# EAGLE board pcie-host (EAGLE 8.3.2), part 1 of 2
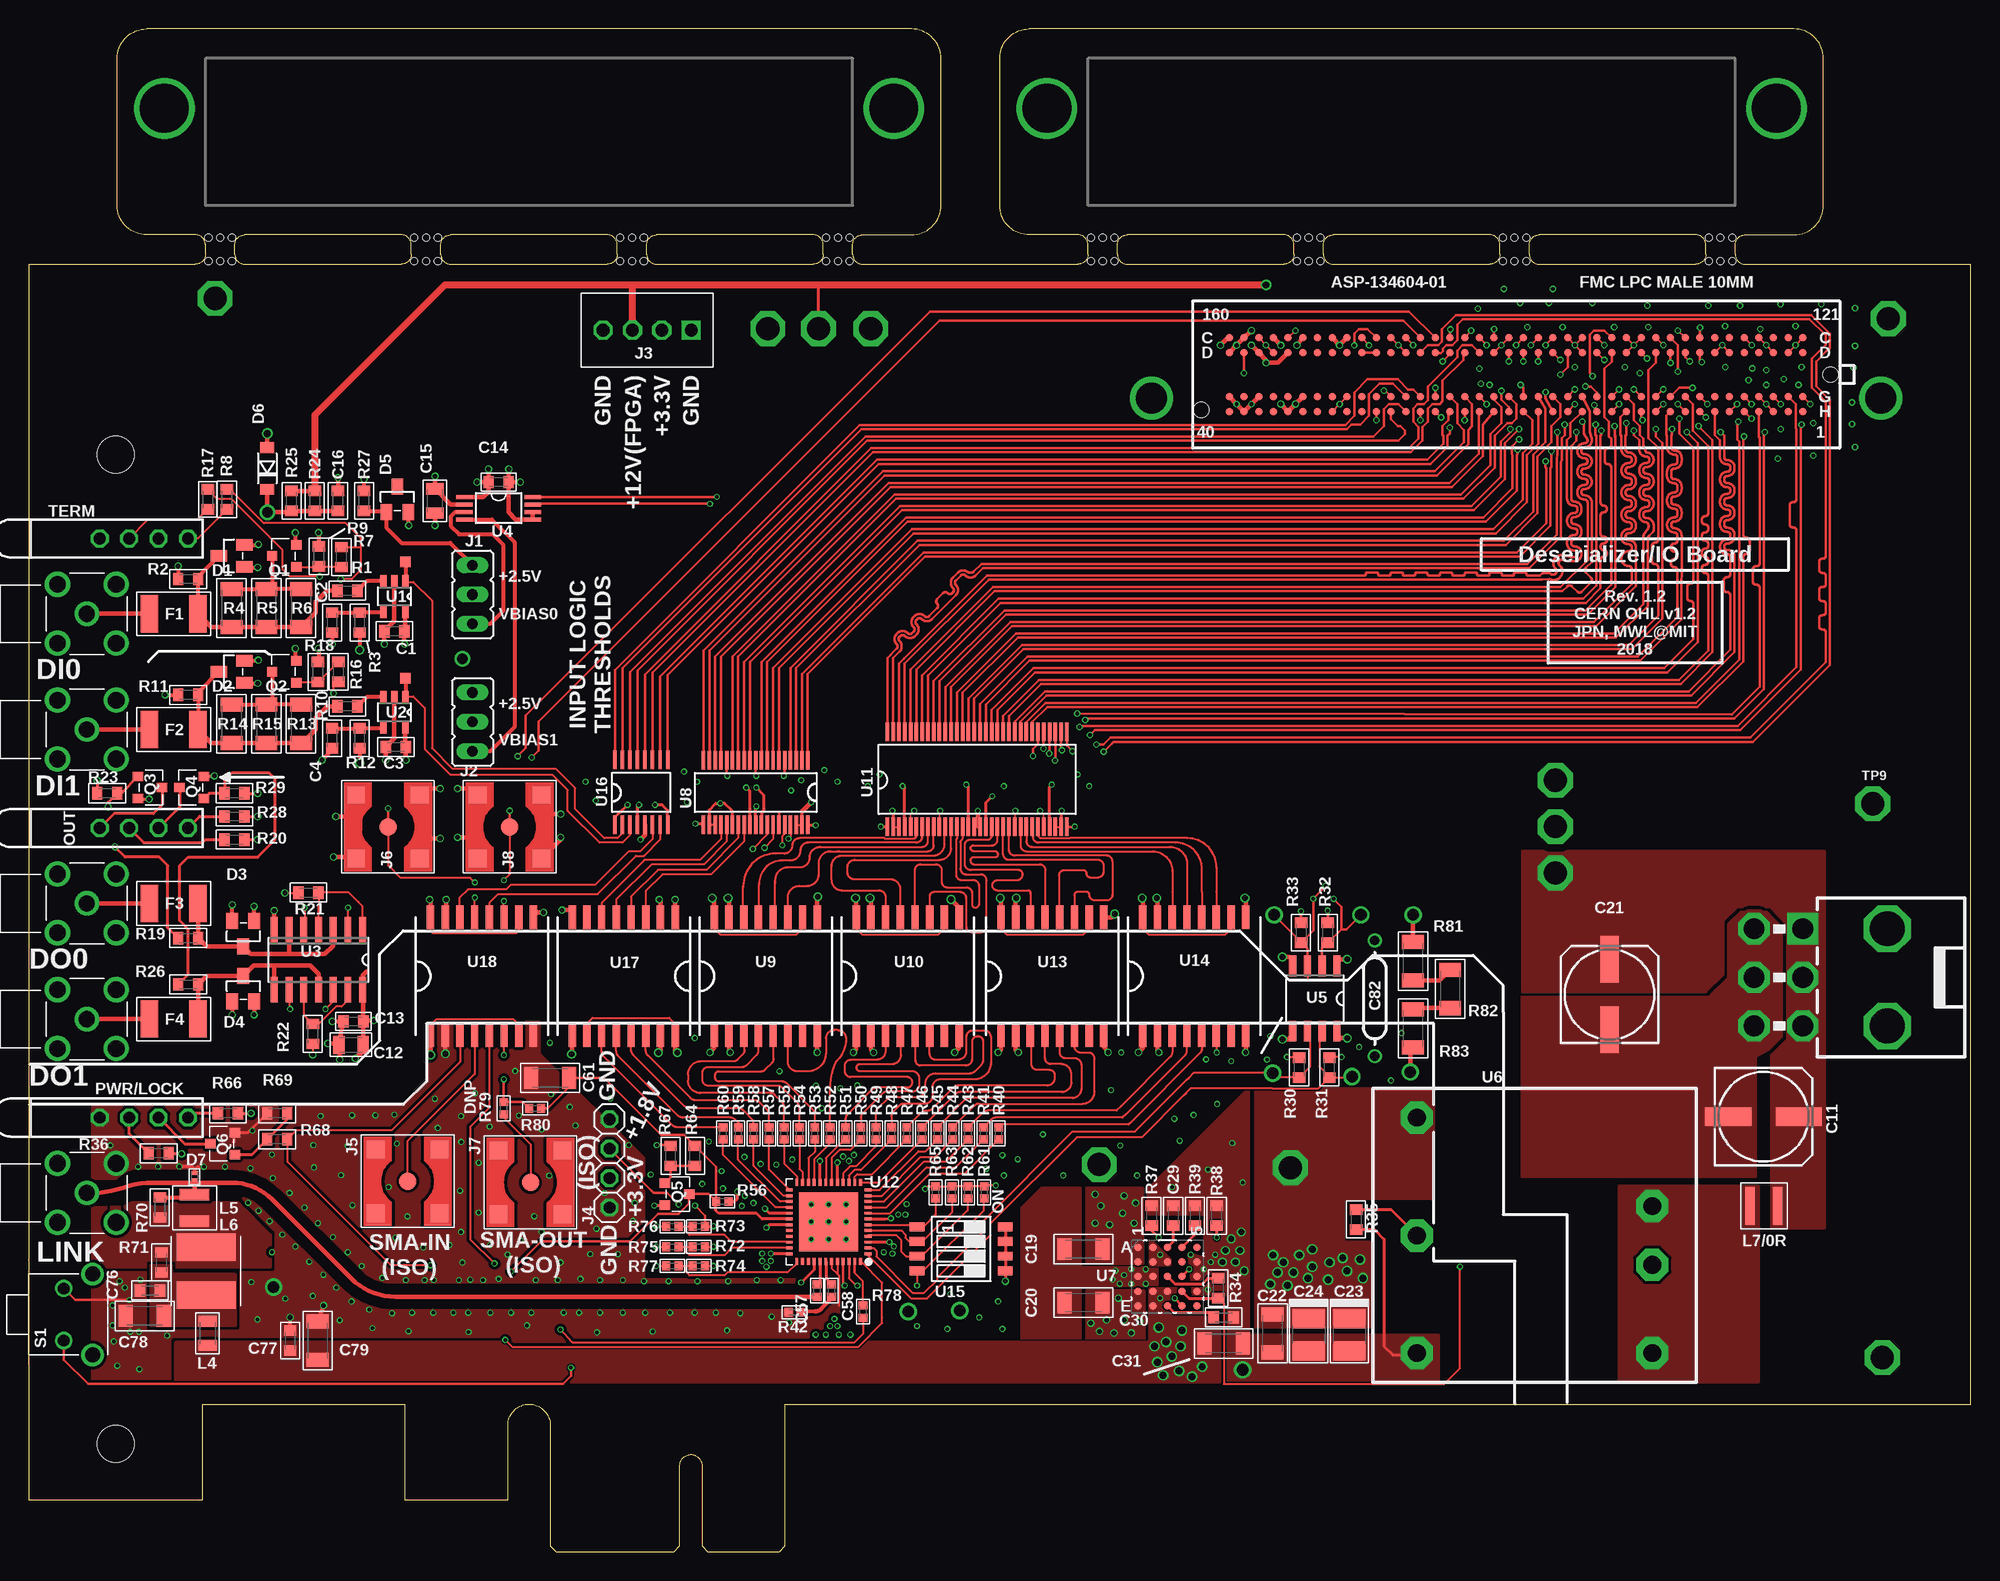
[diagram p0: board, top side]
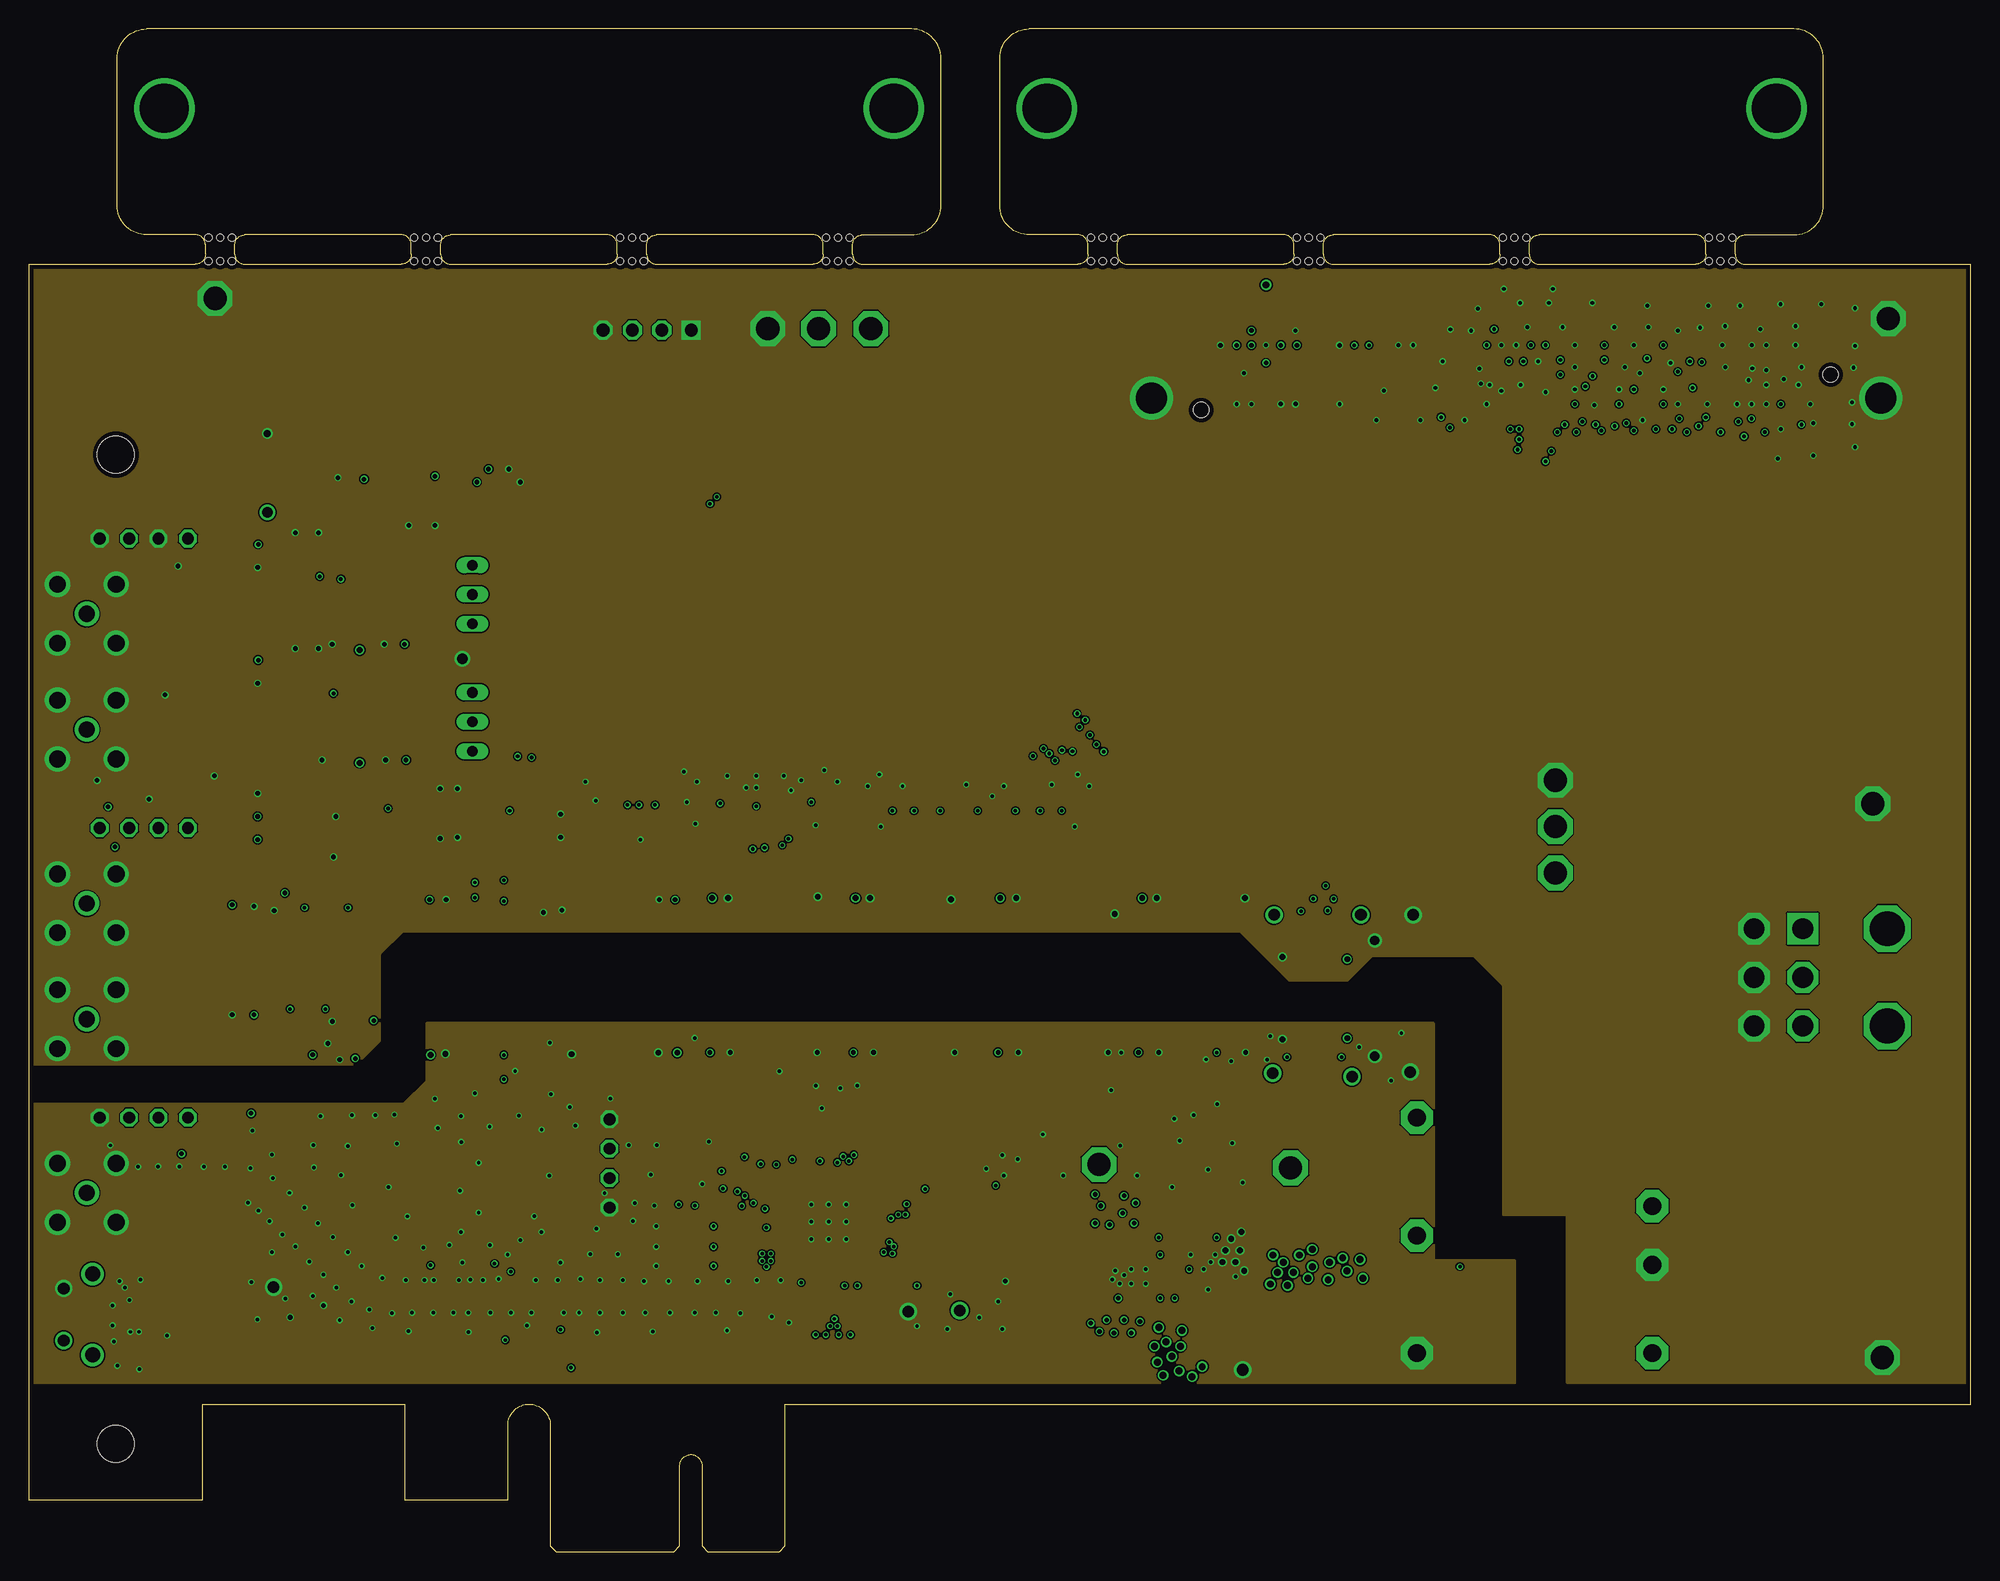
[diagram p1: board, inner layer Route2]
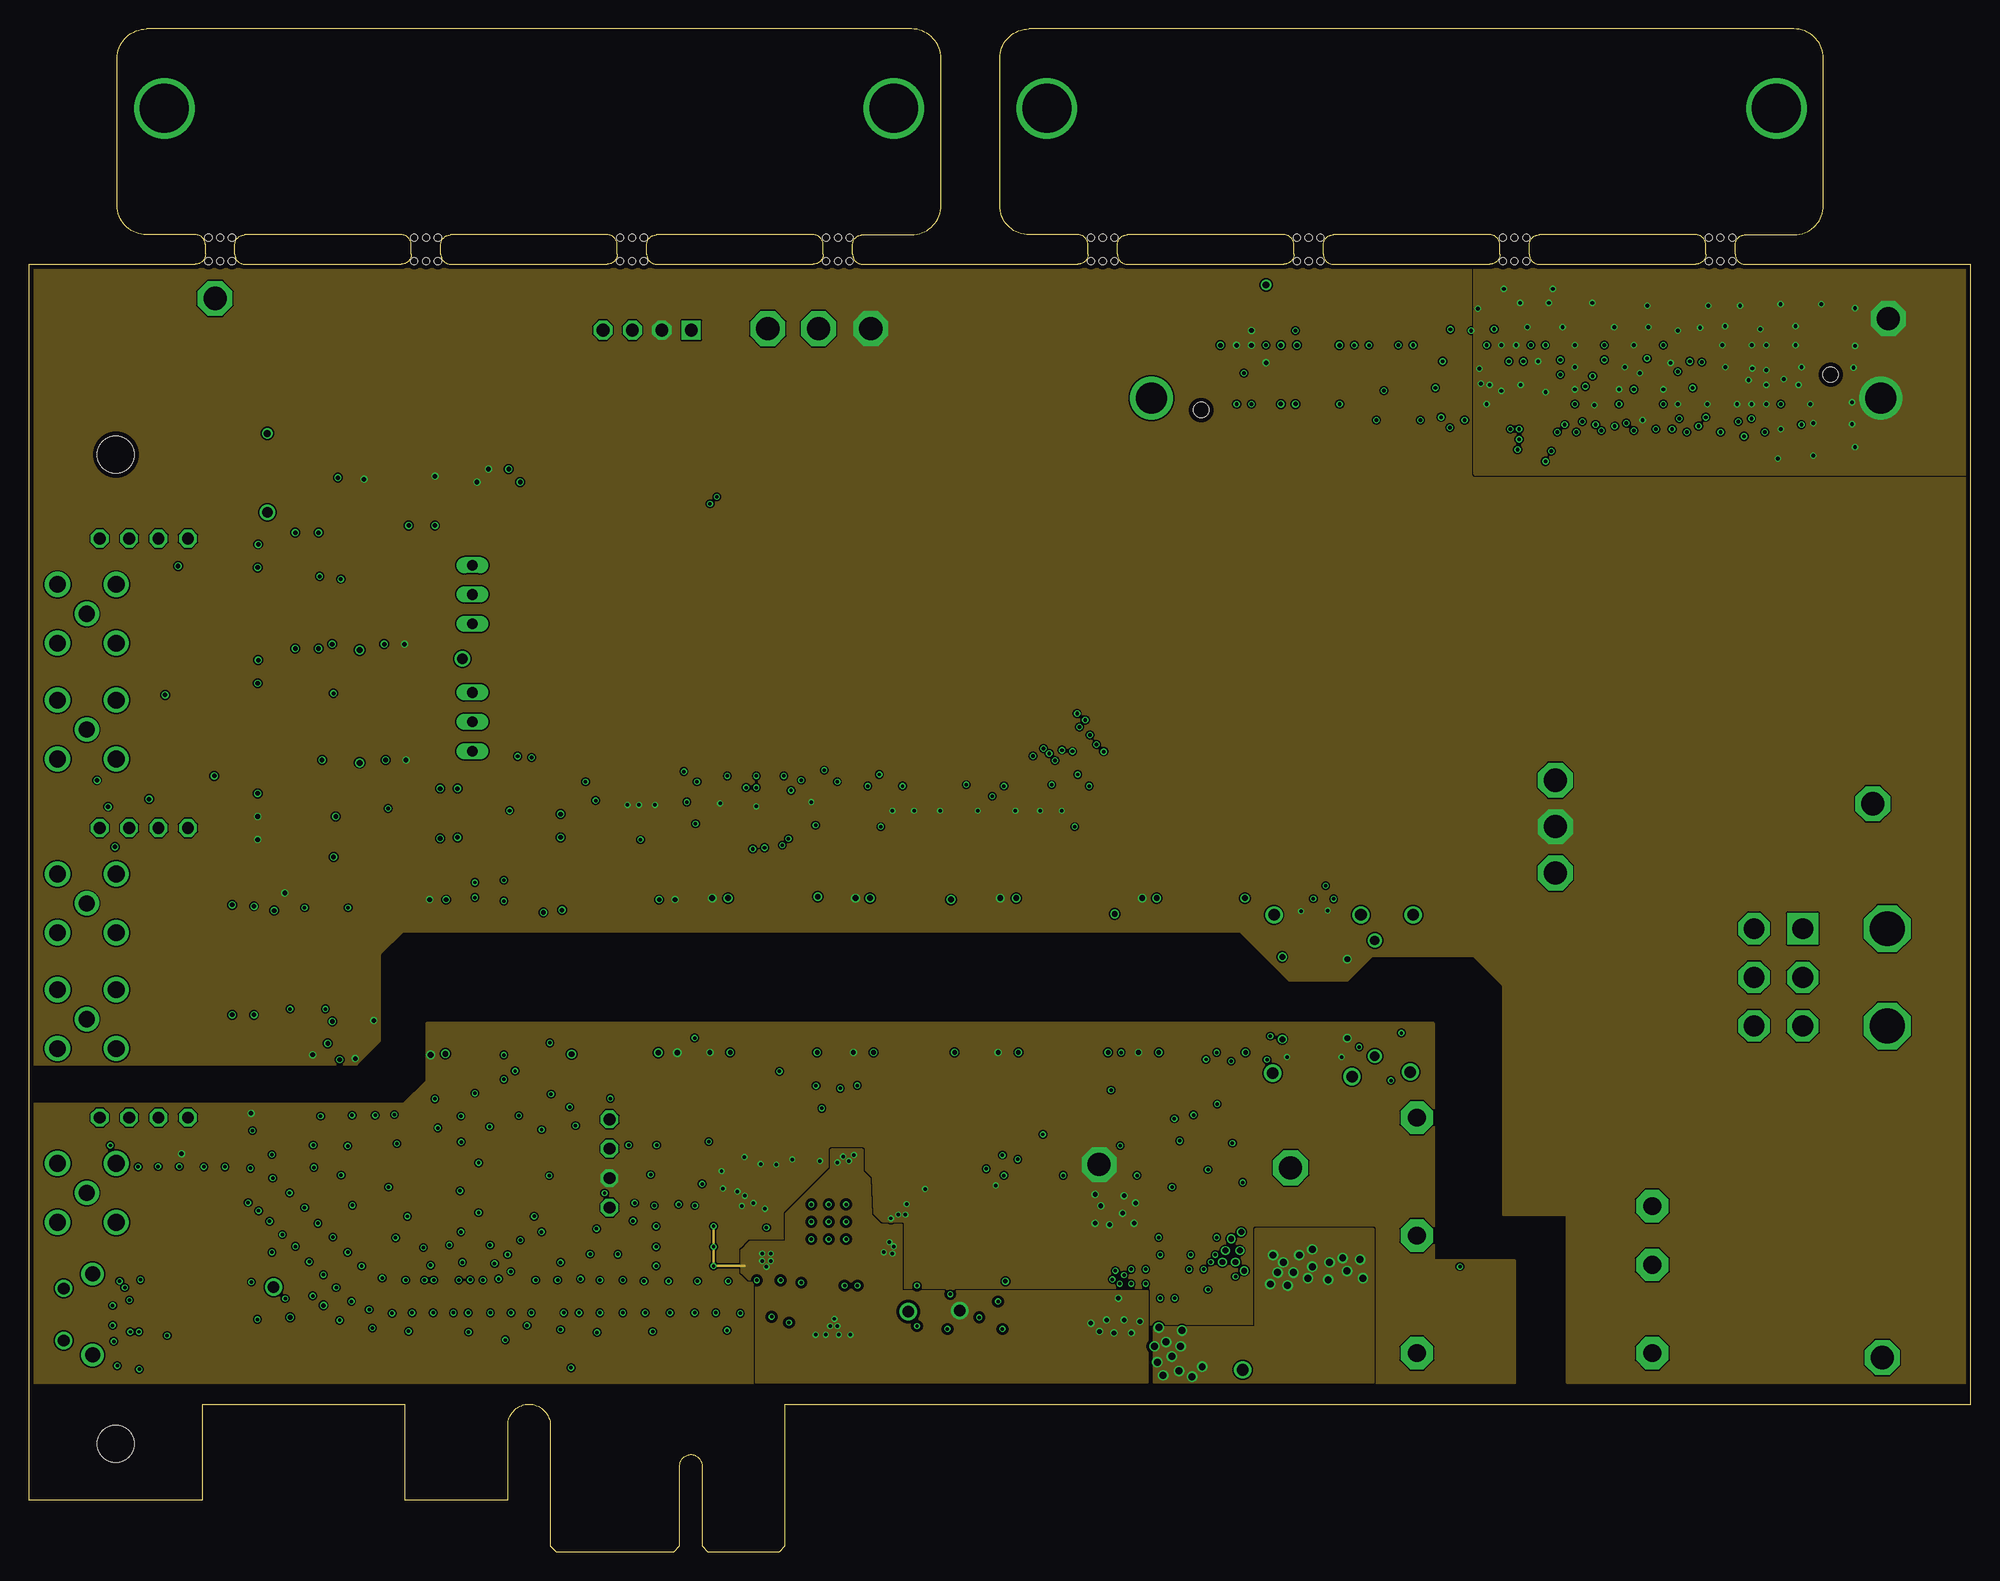
[diagram p2: board, inner layer Route15]
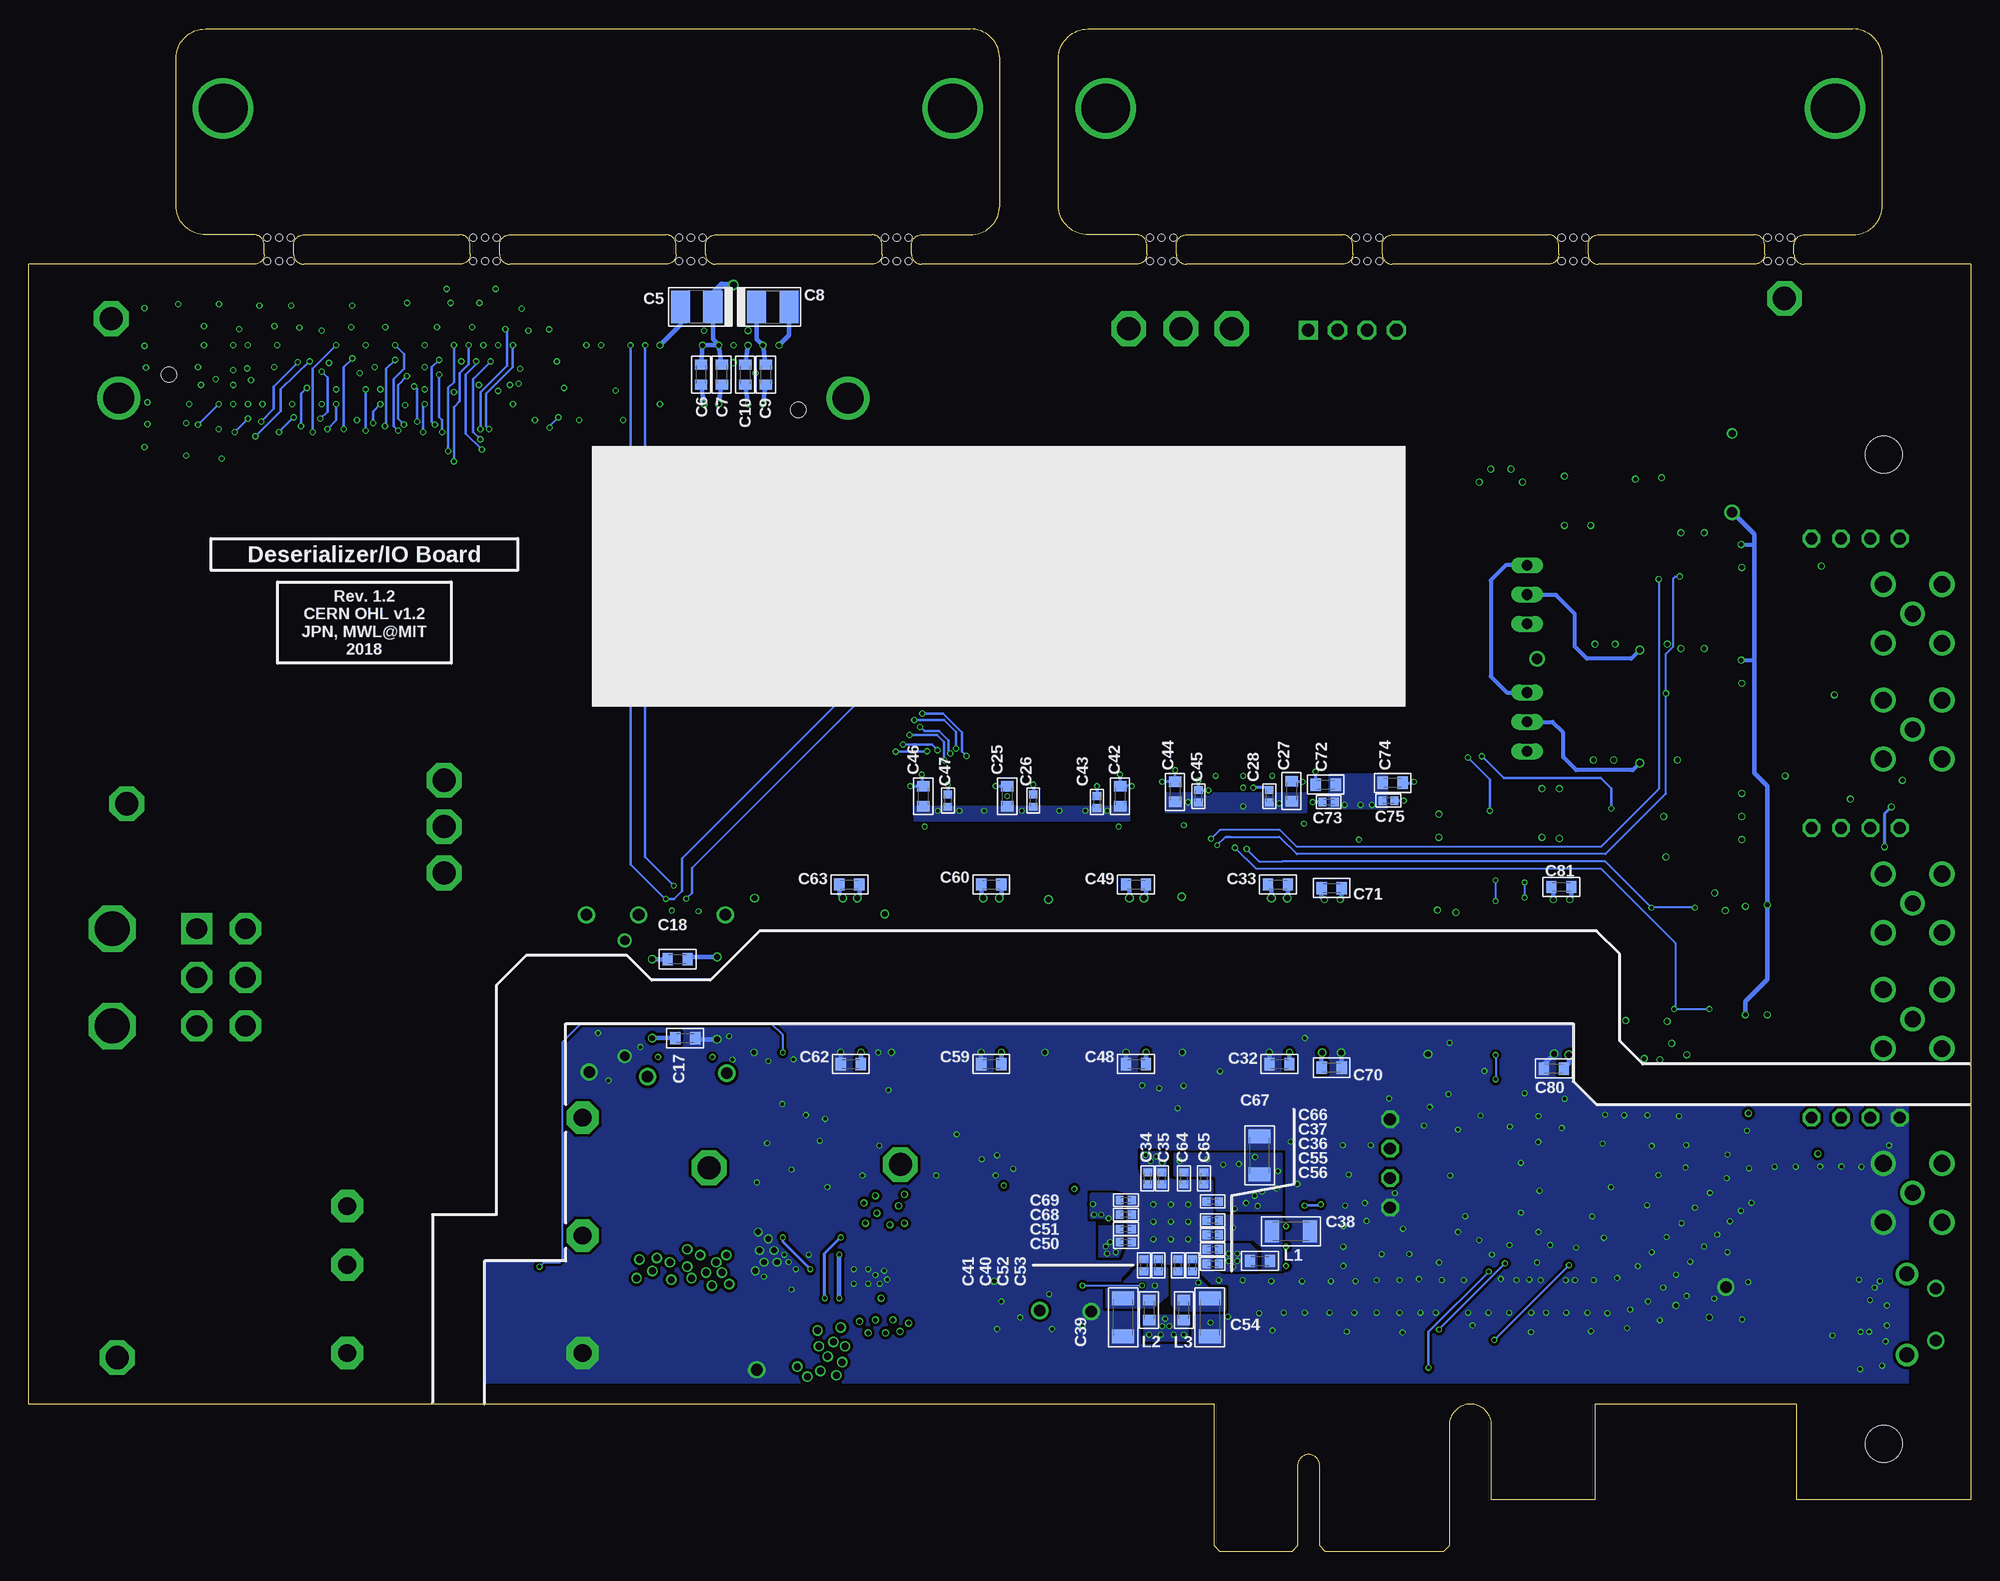
[diagram p3: board, bottom side, seen from below]

Size 167.64 x 131.5 mm. Coordinates in mm from the lower left corner, seen from the top.
Copper layers (1*2*15*16): Top 0.035559375mm / dielectric 0.17018125mm / Route2 0.01778125mm / dielectric 47mil / Route15 0.01778125mm / dielectric 0.17018125mm / Bottom 0.035559375mm
Design rules "ohs-park-4-layer *": minimum track width 5mil, minimum drill 0.3mm, track to track 5mil, track to pad 5mil, pad to pad 5mil, via to via 5mil, smd to smd 5mil, copper to edge 15mil, drill to drill 5mil, minimum pad ring 4mil, minimum via ring 4mil, stop-mask expansion 4mil, vias tented up to drill 100mil, thermal gap 10mil
Net classes: 1 diff: width 0.229 mm, drill 0.33 mm, clearance 0.127 mm
tRestrict: 9 lines

## Footprints (pad centres in the part's own frame; a part is rotated, then mirrored left to right if it is on the bottom)
0603 = smd 0.889 x 1.067: 1 -0.864,0; 2 0.864,0
1210-POL = smd 1.651 x 2.794: + -1.397,0; - 1.397,0
153CLV-0807 = smd 4 x 1.6: + 3.05,0; - -3.05,0
0805 = smd 0.965 x 1.524: 1 -1.041,0; 2 1.041,0
1206 = smd 1.219 x 1.88: 1 -1.651,0; 2 1.651,0
0402 = smd 0.686 x 0.762: 1 -0.533,0; 2 0.533,0
C900 = drill 0.8: 1 -5,0; 2 5,0
SOT23 = smd 1 x 1.4: 1 -0.95,-1.1; 2 0.95,-1.1; 3 0,1.1
SOD123 = smd 0.914 x 1.219: A -1.8,0; C 1.8,0
0402P-DFN = smd 0.35 x 0.6: A -0.325,0; C 0.325,0
SMA_JACK_CONREVSMA002-G = drill 1.397: CLK 0,0 | drill 1.448: GND$1 -2.54,2.54; GND$2 2.54,2.54; GND$3 -2.54,-2.54; GND$4 2.54,-2.54
1812 = smd 1.5 x 3.2: 1 -2.1,0; 2 2.1,0
FMC_LPC_MALE_WITH_SP601_BSILK = drill 2.692: GNDA -31.496,2.032; GNDB 31.496,2.032 | smd 0.635 x 0.635 bottom: P$1 24.765,3.175; P$2 23.495,3.175; P$3 22.225,3.175; P$4 20.955,3.175; P$5 19.685,3.175; P$6 18.415,3.175; P$7 17.145,3.175; P$8 15.875,3.175; P$9 14.605,3.175; P$10 13.335,3.175; P$11 12.065,3.175; P$12 10.795,3.175; P$13 9.525,3.175; P$14 8.255,3.175; P$15 6.985,3.175; P$16 5.715,3.175; P$17 4.445,3.175; P$18 3.175,3.175; P$19 1.905,3.175; P$20 0.635,3.175; P$21 -0.635,3.175; P$22 -1.905,3.175; P$23 -3.175,3.175; P$24 -4.445,3.175; P$25 -5.715,3.175; P$26 -6.985,3.175; P$27 -8.255,3.175; P$28 -9.525,3.175; P$29 -10.795,3.175; P$30 -12.065,3.175; P$31 -13.335,3.175; P$32 -14.605,3.175; P$33 -15.875,3.175; P$34 -17.145,3.175; P$35 -18.415,3.175; P$36 -19.685,3.175; P$37 -20.955,3.175; P$38 -22.225,3.175; P$39 -23.495,3.175; P$40 -24.765,3.175; P$41 24.765,1.905; P$42 23.495,1.905; P$43 22.225,1.905; P$44 20.955,1.905; P$45 19.685,1.905; P$46 18.415,1.905; P$47 17.145,1.905; P$48 15.875,1.905; P$49 14.605,1.905; P$50 13.335,1.905; P$51 12.065,1.905; P$52 10.795,1.905; P$53 9.525,1.905; P$54 8.255,1.905; P$55 6.985,1.905; P$56 5.715,1.905; P$57 4.445,1.905; P$58 3.175,1.905; P$59 1.905,1.905; P$60 0.635,1.905; P$61 -0.635,1.905; P$62 -1.905,1.905; P$63 -3.175,1.905; P$64 -4.445,1.905; P$65 -5.715,1.905; P$66 -6.985,1.905; P$67 -8.255,1.905; P$68 -9.525,1.905; P$69 -10.795,1.905; P$70 -12.065,1.905; P$71 -13.335,1.905; P$72 -14.605,1.905; P$73 -15.875,1.905; P$74 -17.145,1.905; P$75 -18.415,1.905; P$76 -19.685,1.905; P$77 -20.955,1.905; P$78 -22.225,1.905; P$79 -23.495,1.905; P$80 -24.765,1.905; P$81 24.765,-1.905; P$82 23.495,-1.905; P$83 22.225,-1.905; P$84 20.955,-1.905; P$85 19.685,-1.905; P$86 18.415,-1.905; P$87 17.145,-1.905; P$88 15.875,-1.905; P$89 14.605,-1.905; P$90 13.335,-1.905; P$91 12.065,-1.905; P$92 10.795,-1.905; P$93 9.525,-1.905; P$94 8.255,-1.905; P$95 6.985,-1.905; P$96 5.715,-1.905; P$97 4.445,-1.905; P$98 3.175,-1.905; P$99 1.905,-1.905; P$100 0.635,-1.905; P$101 -0.635,-1.905; P$102 -1.905,-1.905; P$103 -3.175,-1.905; P$104 -4.445,-1.905; P$105 -5.715,-1.905; P$106 -6.985,-1.905; P$107 -8.255,-1.905; P$108 -9.525,-1.905; P$109 -10.795,-1.905; P$110 -12.065,-1.905; P$111 -13.335,-1.905; P$112 -14.605,-1.905; P$113 -15.875,-1.905; P$114 -17.145,-1.905; P$115 -18.415,-1.905; P$116 -19.685,-1.905; P$117 -20.955,-1.905; P$118 -22.225,-1.905; P$119 -23.495,-1.905; P$120 -24.765,-1.905; P$121 24.765,-3.175; P$122 23.495,-3.175; P$123 22.225,-3.175; P$124 20.955,-3.175; P$125 19.685,-3.175; P$126 18.415,-3.175; P$127 17.145,-3.175; P$128 15.875,-3.175; P$129 14.605,-3.175; P$130 13.335,-3.175; P$131 12.065,-3.175; P$132 10.795,-3.175; P$133 9.525,-3.175; P$134 8.255,-3.175; P$135 6.985,-3.175; P$136 5.715,-3.175; P$137 4.445,-3.175; P$138 3.175,-3.175; P$139 1.905,-3.175; P$140 0.635,-3.175; P$141 -0.635,-3.175; P$142 -1.905,-3.175; P$143 -3.175,-3.175; P$144 -4.445,-3.175; P$145 -5.715,-3.175; P$146 -6.985,-3.175; P$147 -8.255,-3.175; P$148 -9.525,-3.175; P$149 -10.795,-3.175; P$150 -12.065,-3.175; P$151 -13.335,-3.175; P$152 -14.605,-3.175; P$153 -15.875,-3.175; P$154 -17.145,-3.175; P$155 -18.415,-3.175; P$156 -19.685,-3.175; P$157 -20.955,-3.175; P$158 -22.225,-3.175; P$159 -23.495,-3.175; P$160 -24.765,-3.175 | hole 1.321: 27.165,0; -27.191,3.048
JP3 = drill 0.914 long: 1 0,0; 2 2.54,0; 3 5.08,0
SCREW4 = drill 1.1 square: 1 0,0 | drill 1.1 octagon: 2 2.54,0; 3 5.08,0; 4 7.62,0
1X04 = drill 1.016 octagon: 1 -3.81,0; 2 -1.27,0; 3 1.27,0; 4 3.81,0
SMA_VERT = smd 1.5 x 1.5: G1 -2.75,2.75; G2 -2.75,-2.75; G3 2.75,-2.75; G4 2.75,2.75; SIG 0,0
1008PS = smd 2.54 x 1.016: 1 0,1.143; 2 0,-1.143
SRN6045TA = smd 5.1 x 2.35: 1 0,2.075; 2 0,-2.075
4020 = smd 0.813 x 3.251: 1 -1.181,0; 2 1.181,0
569-011X-X00_LED_ARRAY = drill 1.016 octagon: A1 -6.35,0; A2 -1.27,0; C1 -8.89,0; C2 -3.81,0
PCIE-POWER-6PIN = drill 1.8 square: 1 -4.2,0 | drill 1.8 octagon: 2 0,0; 3 4.2,0; 4 -4.2,-4.2; 5 0,-4.2; 6 4.2,-4.2 | drill 3 octagon: P$7 -4.2,7.3; P$8 4.2,7.3
SOT23-GSD = smd 0.8 x 0.9: D 0,0; G -0.95,-2.1; S 0.95,-2.1
EVQPF = drill 1: A 2.25,2.5; B -2.25,2.5 | drill 1.3: M1 3.5,0; M2 -3.5,0
TP09SQ = smd 0.9 x 0.9: TP 0,0
TESTPOINT_0.035IN = drill 0.9: 1 0,0
TESTPOINT_2MM = drill 2 octagon: 1 0,0
TESTPOINT_1MM = drill 1: 1 0,0
SOT-23-5 = smd 0.55 x 1: 1 -0.95,-1.35; 2 0,-1.35; 3 0.95,-1.35; 4 0.95,1.35; 5 -0.95,1.35
SO14 = smd 0.6 x 2.2: 1 -3.81,-2.6; 2 -2.54,-2.6; 3 -1.27,-2.6; 4 0,-2.6; 5 1.27,-2.6; 6 2.54,-2.6; 7 3.81,-2.6; 8 3.81,2.6; 9 2.54,2.6; 10 1.27,2.6; 11 0,2.6; 12 -1.27,2.6; 13 -2.54,2.6; 14 -3.81,2.6
TSSOP-8 = smd 0.348 x 1.45: 1 -0.973,-2.95; 2 -0.323,-2.95; 3 0.327,-2.95; 4 0.977,-2.95; 5 0.977,2.95; 6 0.327,2.95; 7 -0.323,2.95; 8 -0.973,2.95
SOIC127P500X400-8N = smd 1.778 x 0.635: 1 -2.819,1.905; 2 -2.819,0.635; 3 -2.819,-0.635; 4 -2.819,-1.905; 5 2.819,-1.905; 6 2.819,-0.635; 7 2.819,0.635; 8 2.794,1.905
UEI15 = drill 1.524 pad 2.794 octagon: 1 10.16,2.54; 2 10.16,-2.54; 3 -10.16,10.16; 4 -10.16,0; 5 -10.16,-10.16; 6 10.16,-10.16
BGA_5X5_625X625 = smd 0.635 x 0.635: A1 -2.54,2.54; A2 -1.27,2.54; A3 0,2.54; A4 1.27,2.54; A5 2.54,2.54; B1 -2.54,1.27; B2 -1.27,1.27; B3 0,1.27; B4 1.27,1.27; B5 2.54,1.27; C1 -2.54,0; C2 -1.27,0; C3 0,0; C4 1.27,0; C5 2.54,0; D1 -2.54,-1.27; D2 -1.27,-1.27; D3 0,-1.27; D4 1.27,-1.27; D5 2.54,-1.27; E1 -2.54,-2.54; E2 -1.27,-2.54; E3 0,-2.54; E4 1.27,-2.54; E5 2.54,-2.54
TSSOP-38 = smd 1.6 x 0.3: 1 -2.8,7.75; 2 -2.8,7.25; 3 -2.8,6.75; 4 -2.8,6.25; 5 -2.8,5.75; 6 -2.8,5.25; 7 -2.8,4.75; 8 -2.8,4.25; 9 -2.8,3.75; 10 -2.8,3.25; 11 -2.8,2.75; 12 -2.8,2.25; 13 -2.8,1.75; 14 -2.8,1.25; 15 -2.8,0.75; 16 -2.8,0.25; 17 -2.8,-0.25; 18 -2.8,-0.75; 19 -2.8,-1.25; 20 2.8,-1.25; 21 2.8,-0.75; 22 2.8,-0.25; 23 2.8,0.25; 24 2.8,0.75; 25 2.8,1.25; 26 2.8,1.75; 27 2.8,2.25; 28 2.8,2.75; 29 2.8,3.25; 30 2.8,3.75; 31 2.8,4.25; 32 2.8,4.75; 33 2.8,5.25; 34 2.8,5.75; 35 2.8,6.25; 36 2.8,6.75; 37 2.8,7.25; 38 2.8,7.75
SOIC_WIDE_16 = smd 0.635 x 2.032: P1 -4.445,-5.08; P2 -3.175,-5.08; P3 -1.905,-5.08; P4 -0.635,-5.08; P5 0.635,-5.08; P6 1.905,-5.08; P7 3.175,-5.08; P8 4.445,-5.08; P9 4.445,5.08; P10 3.175,5.08; P11 1.905,5.08; P12 0.635,5.08; P13 -0.635,5.08; P14 -1.905,5.08; P15 -3.175,5.08; P16 -4.445,5.08
TSSOP-64 = smd 1.6 x 0.3: 1 -4.1,7.75; 2 -4.1,7.25; 3 -4.1,6.75; 4 -4.1,6.25; 5 -4.1,5.75; 6 -4.1,5.25; 7 -4.1,4.75; 8 -4.1,4.25; 9 -4.1,3.75; 10 -4.1,3.25; 11 -4.1,2.75; 12 -4.1,2.25; 13 -4.1,1.75; 14 -4.1,1.25; 15 -4.1,0.75; 16 -4.1,0.25; 17 -4.1,-0.25; 18 -4.1,-0.75; 19 -4.1,-1.25; 20 -4.1,-1.75; 21 -4.1,-2.25; 22 -4.1,-2.75; 23 -4.1,-3.25; 24 -4.1,-3.75; 25 -4.1,-4.25; 26 -4.1,-4.75; 27 -4.1,-5.25; 28 -4.1,-5.75; 29 -4.1,-6.25; 30 -4.1,-6.75; 31 -4.1,-7.25; 32 -4.1,-7.75; 33 4.1,-7.75; 34 4.1,-7.25; 35 4.1,-6.75; 36 4.1,-6.25; 37 4.1,-5.75; 38 4.1,-5.25; 39 4.1,-4.75; 40 4.1,-4.25; 41 4.1,-3.75; 42 4.1,-3.25; 43 4.1,-2.75; 44 4.1,-2.25; 45 4.1,-1.75; 46 4.1,-1.25; 47 4.1,-0.75; 48 4.1,-0.25; 49 4.1,0.25; 50 4.1,0.75; 51 4.1,1.25; 52 4.1,1.75; 53 4.1,2.25; 54 4.1,2.75; 55 4.1,3.25; 56 4.1,3.75; 57 4.1,4.25; 58 4.1,4.75; 59 4.1,5.25; 60 4.1,5.75; 61 4.1,6.25; 62 4.1,6.75; 63 4.1,7.25; 64 4.1,7.75
WQFN48 = smd 0.25 x 0.6: 1 2.75,3.4; 2 2.25,3.4; 3 1.75,3.4; 4 1.25,3.4; 5 0.75,3.4; 6 0.25,3.4; 7 -0.25,3.4; 8 -0.75,3.4; 9 -1.25,3.4; 10 -1.75,3.4; 11 -2.25,3.4; 12 -2.75,3.4; 25 -2.75,-3.4; 26 -2.25,-3.4; 27 -1.75,-3.4; 28 -1.25,-3.4; 29 -0.75,-3.4; 30 -0.25,-3.4; 31 0.25,-3.4; 32 0.75,-3.4; 33 1.25,-3.4; 34 1.75,-3.4; 35 2.25,-3.4; 36 2.75,-3.4 | smd 0.6 x 0.25: 13 -3.4,2.75; 14 -3.4,2.25; 15 -3.4,1.75; 16 -3.4,1.25; 17 -3.4,0.75; 18 -3.4,0.25; 19 -3.4,-0.25; 20 -3.4,-0.75; 21 -3.4,-1.25; 22 -3.4,-1.75; 23 -3.4,-2.25; 24 -3.4,-2.75; 37 3.4,-2.75; 38 3.4,-2.25; 39 3.4,-1.75; 40 3.4,-1.25; 41 3.4,-0.75; 42 3.4,-0.25; 43 3.4,0.25; 44 3.4,0.75; 45 3.4,1.25; 46 3.4,1.75; 47 3.4,2.25; 48 3.4,2.75 | smd 5.1 x 5.1: 49 0,0
DIP04-SMD = smd 0.76 x 1.27: 1 0,-7.62; 2 1.27,-7.62; 3 2.54,-7.62; 4 3.81,-7.62; 5 3.81,0; 6 2.54,0; 7 1.27,0; 8 0,0
TSSOP-16 = smd 1.6 x 0.3: 1 -2.8,2.275; 2 -2.8,1.625; 3 -2.8,0.975; 4 -2.8,0.325; 5 -2.8,-0.325; 6 -2.8,-0.975; 7 -2.8,-1.625; 8 -2.8,-2.275; 9 2.8,-2.275; 10 2.8,-1.625; 11 2.8,-0.975; 12 2.8,-0.325; 13 2.8,0.325; 14 2.8,0.975; 15 2.8,1.625; 16 2.8,2.275
PCI-ADDIN_STD-H_HALF-L_FMC-STRAIN = drill 4.216: GNDA 11.684,120.142; GNDA1 87.884,120.142; GNDB 74.676,120.142; GNDB1 150.876,120.142 | hole 3.175: 7.5,4.85; 7.5,90.246 | hole 0.6: 15.494,108.966; 16.51,108.966; 17.526,108.966; 15.494,106.934; 16.51,106.934; 17.526,106.934; 33.274,108.966; 34.29,108.966; 35.306,108.966; 33.274,106.934; 34.29,106.934; 35.306,106.934; 51.054,108.966; 52.07,108.966; 53.086,108.966; 51.054,106.934; 52.07,106.934; 53.086,106.934; 68.834,108.966; 69.85,108.966; 70.866,108.966; 68.834,106.934; 69.85,106.934; 70.866,106.934; 91.694,108.966; 92.71,108.966; 93.726,108.966; 91.694,106.934; 92.71,106.934; 93.726,106.934; 109.474,108.966; 110.49,108.966; 111.506,108.966; 109.474,106.934; 110.49,106.934; 111.506,106.934; 127.254,108.966; 128.27,108.966; 129.286,108.966; 127.254,106.934; 128.27,106.934; 129.286,106.934; 145.034,108.966; 146.05,108.966; 147.066,108.966; 145.034,106.934; 146.05,106.934; 147.066,106.934

## Placement (x,y rotation side)
C1  0.1uF  [0603]  31.55,79.49 180 top
C2  0.1uF  [0603]  26.18,80.24 270 top
C3  0.1uF  [0603]  31.68,69.49 180 top
C4  0.1uF  [0603]  26.18,70.24 270 top
C5  22uF  [1210-POL]  109.99,107.49 180 bottom
C6  0.1uF  [0603]  109.61,101.65 90 bottom
C7  0.1uF  [0603]  107.83,101.65 90 bottom
C8  22uF  [1210-POL]  103.42,107.5 0 bottom
C9  0.1uF  [0603]  104.02,101.65 90 bottom
C10  0.1uF  [0603]  105.8,101.65 90 bottom
C11  47uF  [153CLV-0807]  149.76,37.57 0 top
C12  1uF  [0805]  27.8,43.77 0 top
C13  0.1uF  [0603]  28,45.8 0 top
C14  0.1uF  [0603]  40.55,92.37 180 top
C15  1uF  [0805]  35.05,90.74 90 top
C16  0.1uF  [0603]  26.68,90.74 270 top
C17  0.1uF  [0603]  110.98,44.36 180 bottom
C18  0.1uF  [0603]  111.64,51.17 180 bottom
C19  22uF  [1206]  91.05,26.14 0 top
C20  22uF  [1206]  91.05,21.52 0 top
C21  100uF  [153CLV-0807]  136.47,48.13 90 top
C22  10uF  [1206]  107.37,18.87 90 top
C23  22uF  [1210-POL]  114,18.75 270 top
C24  22uF  [1210-POL]  110.5,18.75 270 top
C25  0.1uF  [0603]  83.18,65.24 270 bottom
C26  1nF  [0402]  80.93,64.87 270 bottom
C27  0.1uF  [0603]  58.63,65.69 270 bottom
C28  1nF  [0402]  60.55,65.24 270 bottom
C29  0.1uF  [0603]  98.8,29.02 270 top
C30  0.1uF  [0603]  103.15,20.24 180 top
C31  10uF  [1206]  103.15,17.99 180 top
C32  0.1uF  [0603]  59.68,42.12 0 bottom
C33  0.1uF  [0603]  59.8,57.62 0 bottom
C34  10nF  [0402]  71.05,32.24 90 bottom
C35  0.1uF  [0402]  69.8,32.24 90 bottom
C36  10nF  [0402]  65.43,27.37 0 bottom
C37  0.1uF  [0402]  65.43,28.62 0 bottom
C38  4.7uF  [1206]  58.67,27.67 180 bottom
C39  4.7uF  [1206]  73.18,20.24 90 bottom
C40  0.1uF  [0402]  70.12,24.74 270 bottom
C41  10nF  [0402]  71.37,24.74 270 bottom
C42  0.1uF  [0603]  73.43,65.24 270 bottom
C43  1nF  [0402]  75.43,64.74 270 bottom
C44  0.1uF  [0603]  68.68,65.62 270 bottom
C45  1nF  [0402]  66.68,65.24 270 bottom
C46  0.1uF  [0603]  90.43,65.24 270 bottom
C47  1nF  [0402]  88.3,64.87 270 bottom
C48  0.1uF  [0603]  72.05,42.12 0 bottom
C49  0.1uF  [0603]  72.05,57.62 0 bottom
C50  10nF  [0402]  72.93,26.74 180 bottom
C51  0.1uF  [0402]  72.93,27.87 180 bottom
C52  10nF  [0402]  68.43,24.74 270 bottom
C53  0.1uF  [0402]  67.18,24.74 270 bottom
C54  4.7uF  [1206]  65.68,20.24 90 bottom
C55  10nF  [0402]  65.43,26.12 0 bottom
C56  0.1uF  [0402]  65.43,24.87 0 bottom
C57  0.1uF  [0402]  68.05,22.57 270 top
C58  47nF  [0402]  69.3,22.57 270 top
C59  0.1uF  [0603]  84.55,42.12 0 bottom
C60  0.1uF  [0603]  84.55,57.62 0 bottom
C61  10uF  [1206]  45,40.92 0 top
C62  0.1uF  [0603]  96.68,42.12 0 bottom
C63  0.1uF  [0603]  96.8,57.62 0 bottom
C64  10nF  [0402]  67.93,32.24 90 bottom
C65  10nF  [0402]  66.18,32.24 90 bottom
C66  0.1uF  [0402]  65.43,30.24 0 bottom
C67  4.7uF  [1206]  61.39,34.24 270 bottom
C68  10nF  [0402]  72.93,29.12 180 bottom
C69  0.1uF  [0402]  72.93,30.37 180 bottom
C70  0.1uF  [0603]  55.17,41.81 180 bottom
C71  0.1uF  [0603]  55.17,57.31 180 bottom
C72  0.1uF  [0603]  55.68,66.24 0 bottom
C73  1nF  [0402]  55.43,64.74 0 bottom
C74  0.1uF  [0603]  49.89,66.4 180 bottom
C75  1nF  [0402]  50.27,64.86 180 bottom
C76  0.1uF  [0603]  10.45,22.57 180 top
C77  0.1uF  [0603]  22.55,18.24 90 top
C78  4.7uF  [1206]  10,20.37 0 top
C79  4.7uF  [1206]  24.93,18.24 270 top
C80  0.1uF  [0603]  35.98,41.73 0 bottom
C81  0.1uF  [0603]  35.33,57.41 0 bottom
C82  2.2nF,X/Y  [C900]  116.2,47.8 270 top
D1  BAR66  [SOT23]  17.5,86 90 top
D2  BAR66  [SOT23]  17.5,76 90 top
D3  BAR66  [SOT23]  18.5,53.37 180 top
D4  BAR66  [SOT23]  18.5,48.62 0 top
D5  LM4040D25FTA  [SOT23]  31.8,90.87 0 top
D6  KDZ4.3B  [SOD123]  20.58,93.54 270 top
D7  SESD0402X1UN-0020-090  [0402P-DFN]  14.3,32.4 270 top
DI0  SMA002  [SMA_JACK_CONREVSMA002-G]  5,81 0 top
DI1  SMA002  [SMA_JACK_CONREVSMA002-G]  5,71 0 top
DO0  SMA002  [SMA_JACK_CONREVSMA002-G]  5,56 0 top
DO1  SMA002  [SMA_JACK_CONREVSMA002-G]  5,46 0 top
F1  C014F-2  [1812]  12.5,81 0 top
F2  C014F-2  [1812]  12.5,71 0 top
F3  C014F-2  [1812]  12.5,56 0 top
F4  C014F-2  [1812]  12.5,46 0 top
FMC_LPC  FMC_LPC_160_PIN  [FMC_LPC_MALE_WITH_SP601_BSILK]  128.41,101.65 180 bottom
J1  [JP3]  38.3,80.12 90 top
J2  [JP3]  38.3,69.12 90 top
J3  COMM  [SCREW4]  57.18,105.49 180 top
J4  ISO  [1X04]  50.12,33.54 270 top
J5  [SMA_VERT]  32.7,32 0 top
J6  [SMA_VERT]  31,62.6 0 top
J7  [SMA_VERT]  43.3,31.9 0 top
J8  [SMA_VERT]  41.5,62.6 0 top
L1  BLM18KG601SN1D  [0603]  61.35,25.12 180 bottom
L2  BLM18KG601SN1D  [0603]  70.93,20.87 90 bottom
L3  BLM18KG601SN1D  [0603]  67.93,20.87 270 bottom
L4  MPZ2012S102AT000  [0805]  15.43,18.87 90 top
L5  1008PS-472  [1008PS]  14.3,29.69 180 top
L6  SRNxx-101M  [SRN6045TA]  15.3,24.24 180 top
L7/0R  74438356010  [4020]  149.8,29.87 180 top
LINK  SMA002  [SMA_JACK_CONREVSMA002-G]  5,31 0 top
OUT  569-011x  [569-011X-X00_LED_ARRAY]  15,62.5 0 top
PCIE-PWR  0455580003  [PCIE-POWER-6PIN]  153.15,49.61 270 top
PWR/LOCK  569-011x  [569-011X-X00_LED_ARRAY]  15,37.5 0 top
Q1  BSH103  [SOT23-GSD]  21,86 90 top
Q2  BSH103  [SOT23-GSD]  21,76 90 top
Q3  NDS351AN  [SOT23-GSD]  11.5,66 270 top
Q4  NDS351AN  [SOT23-GSD]  13,66 90 top
Q5  NDS351  [SOT23-GSD]  57,30.9 270 top
Q6  NDS351AN  [SOT23-GSD]  15.68,35.24 90 top
R1  100  [0603]  27.5,83 0 top
R2  2.2k  [0603]  13.75,84 0 top
R3  10k  [0603]  28.55,80.24 90 top
R4  150,0.25W  [1206]  17.5,81.5 270 top
R5  150,0.25W  [1206]  20.5,81.5 270 top
R6  150,0.25W  [1206]  23.5,81.5 270 top
R7  1k  [0603]  26.98,85.9 270 top
R8  1k  [0603]  17.1,90.88 270 top
R9  100k  [0603]  25.04,85.96 270 top
R10  100  [0603]  27.5,73 0 top
R11  2.2k  [0603]  13.75,74 0 top
R12  10k  [0603]  28.55,70.24 90 top
R13  150,0.25W  [1206]  23.5,71.5 270 top
R14  150,0.25W  [1206]  17.5,71.5 270 top
R15  150,0.25W  [1206]  20.5,71.5 270 top
R16  1k  [0603]  26.73,75.99 90 top
R17  1k  [0603]  15.44,90.88 270 top
R18  100k  [0603]  24.95,75.98 270 top
R19  4.7k  [0603]  13.75,53 0 top
R20  1k  [0603]  17.75,61.5 0 top
R21  2.2k  [0603]  24.13,56.92 180 top
R22  2.2k  [0603]  24.5,44.72 270 top
R23  100k  [0603]  6.75,65.5 0 top
R24  2.2k  [0603]  24.68,90.74 90 top
R25  2.2k  [0603]  22.68,90.74 90 top
R26  4.7k  [0603]  13.75,49 0 top
R27  100  [0603]  28.93,90.74 90 top
R28  1k  [0603]  17.75,63.5 0 top
R29  100k  [0603]  17.75,65.5 180 top
R30  1k  [0603]  109.67,41.82 90 top
R31  1k  [0603]  112.28,41.82 90 top
R32  1k  [0603]  112.14,53.46 90 top
R33  1k  [0603]  109.83,53.46 90 top
R34  10k  [0603]  102.68,22.77 270 top
R35  9.53k  [0603]  114.58,28.7 270 top
R36  1k  [0603]  11.2,34.42 0 top
R37  30.1k  [0603]  96.93,29.02 90 top
R38  649k  [0603]  102.55,29.02 90 top
R39  13.3k  [0603]  100.68,29.02 90 top
R40  22  [0402]  83.73,36.13 270 top
R41  22  [0402]  82.4,36.13 270 top
R42  49.9  [0402]  66.1,20.7 180 top
R43  22  [0402]  81.08,36.13 270 top
R44  22  [0402]  79.76,36.13 270 top
R45  22  [0402]  78.44,36.13 270 top
R46  22  [0402]  77.11,36.13 270 top
R47  22  [0402]  75.79,36.13 270 top
R48  22  [0402]  74.47,36.13 270 top
R49  22  [0402]  73.15,36.13 270 top
R50  22  [0402]  71.82,36.13 270 top
R51  22  [0402]  70.5,36.13 270 top
R52  22  [0402]  69.18,36.13 270 top
R53  22  [0402]  67.86,36.13 270 top
R54  22  [0402]  66.53,36.13 270 top
R55  22  [0402]  65.21,36.13 270 top
R56  10k  [0402]  59.87,30.25 180 top
R57  22  [0402]  63.89,36.13 270 top
R58  22  [0402]  62.57,36.13 270 top
R59  22  [0402]  61.24,36.13 270 top
R60  22  [0402]  59.92,36.13 270 top
R61  10k  [0402]  82.48,31.03 90 top
R62  10k  [0402]  81.08,31.03 90 top
R63  10k  [0402]  79.68,31.03 90 top
R64  1k  [0603]  57.5,34.2 90 top
R65  10k  [0402]  78.29,31.03 90 top
R66  1k  [0603]  17.18,37.87 0 top
R67  100k  [0603]  55.4,34.2 270 top
R68  1k  [0603]  21.43,35.62 0 top
R69  100k  [0603]  21.43,37.87 0 top
R70  1k  [0603]  11.3,29.74 90 top
R71  1k  [0603]  11.43,24.99 90 top
R72  10k  [0402]  57.84,26.34 180 top
R73  10k  [0402]  57.84,28.11 180 top
R74  10k  [0402]  57.84,24.68 180 top
R75  0  [0402]  55.55,26.34 180 top
R76  0  [0402]  55.55,28.11 180 top
R77  3k  [0402]  55.55,24.68 180 top
R78  22  [0402]  72.01,20.75 90 top
R79  0  [0402]  41,38.3 90 top
R80  0  [0402]  43.7,38.3 0 top
R81  330k, 1kV  [1206]  119.5,51 90 top
R82  330k,1kV  [1206]  122.7,48.6 90 top
R83  330k, 1kV  [1206]  119.5,45.2 90 top
S1  [EVQPF]  5.5,20.5 90 top
TERM  569-011x  [569-011X-X00_LED_ARRAY]  15,87.5 0 top
TP1  DI1  [TP09SQ]  32.51,75.44 0 top
TP2  DI0  [TP09SQ]  32.51,85.48 0 top
TP3  GND  [TESTPOINT_0.035IN]  37.43,77.12 0 top
TP4  GND  [TESTPOINT_2MM]  131.8,66.62 0 top
TP5  GND  [TESTPOINT_2MM]  63.79,105.62 0 top
TP6  GND  [TESTPOINT_2MM]  160.03,16.77 0 top
TP7  GND  [TESTPOINT_2MM]  160.54,106.48 0 top
TP8  GND  [TESTPOINT_2MM]  16.07,108.23 0 top
TP9  GND  [TESTPOINT_2MM]  159.2,64.6 0 top
TP10  +3.3V  [TESTPOINT_2MM]  72.69,105.62 270 top
TP11  +3.3V  [TESTPOINT_2MM]  131.8,62.62 0 top
TP12  +12V(FPGA)  [TESTPOINT_2MM]  68.18,105.62 0 top
TP13  +12V(ATX)  [TESTPOINT_2MM]  131.8,58.62 0 top
TP14  VPROTECT(+4.3V)  [TESTPOINT_0.035IN]  20.58,89.77 90 top
TP15  SCL(ISO)  [TESTPOINT_1MM]  107.39,41.33 270 top
TP16  SDA(ISO)  [TESTPOINT_1MM]  114.23,41.03 270 top
TP17  GND(ISO)  [TESTPOINT_1MM]  119.27,41.43 270 top
TP18  GND  [TESTPOINT_1MM]  119.5,55 90 top
TP19  SDA  [TESTPOINT_1MM]  115,55 90 top
TP20  SCL  [TESTPOINT_1MM]  107.5,55 90 top
TP21  GND(ISO)  [TESTPOINT_1MM]  104.79,15.71 180 top
TP22  +1.8V(ISO)  [TESTPOINT_1MM]  80.35,20.85 270 top
TP23  +3.3V(ISO)  [TESTPOINT_2MM]  92.4,33.44 270 top
TP24  +5.5V(ISO)  [TESTPOINT_2MM]  108.93,33.16 90 top
TP25  GND(ISO)  [TESTPOINT_1MM]  21.13,22.87 0 top
TP26  GND(ISO)  [TESTPOINT_1MM]  75.93,20.74 0 top
U1  ADCMP600  [SOT-23-5]  31.55,82.49 180 top
U2  ADCMP600  [SOT-23-5]  31.55,72.49 180 top
U3  SN74LVT125  [SO14]  25,51.12 180 top
U4  MCP47FEBX2  [TSSOP-8]  40.55,90.12 270 top
U5  ISO1540DR  [SOIC127P500X400-8N]  111.02,47.77 270 top
U6  UEI15-050-Q12P-C  [UEI15]  130,27.32 0 top
U7  LTM4622_BGA  [BGA_5X5_625X625]  98.3,23.77 0 top
U8  SN65LVDT388A  [TSSOP-38]  59.5,65.56 270 top
U9  ISO7740  [SOIC_WIDE_16]  63.62,49.7 0 top
U10  ISO7740  [SOIC_WIDE_16]  75.87,49.7 0 top
U11  SN65LVDS387  [TSSOP-64]  81.87,66.7 90 top
U12  DS90UB914A-Q1  [WQFN48]  69.05,28.49 270 top
U13  ISO7740  [SOIC_WIDE_16]  88.37,49.7 0 top
U14  ISO7740  [SOIC_WIDE_16]  100.62,49.7 0 top
U15  [DIP04-SMD]  84.3,28.07 270 top
U16  SN65LVDS391  [TSSOP-16]  52.87,65.57 90 top
U17  ISO7740  [SOIC_WIDE_16]  51.35,49.7 180 top
U18  ISO7741  [SOIC_WIDE_16]  39.12,49.71 0 top
X1  PCI-MECH_STD-H_HALF-W_FMC-STRAIN  [PCI-ADDIN_STD-H_HALF-L_FMC-STRAIN]  0,4.5 0 top

## Library data of the parts
C1-C11 C16-C82 D1-D7 DI0 DI1 DO0 DO1 F1-F4 FMC_LPC J1-J8 L1-L6 L7/0R LINK OUT PCIE-PWR PWR/LOCK Q1-Q6 R4-R6 R13-R15 R40-R63 R65 R72-R83 S1 TERM TP1-TP26 U1-U18 X1 = jonnew
C12 C15 = jonnew; MN: TDK Corp.; PARTNO: C2012X5R1Cxxxxxxx; VID: DK
C13 C14 R17 = RHD2000_eval_board
R1-R3 R7-R12 R16 R18 R21 R22 R24 R25 R27 R30-R35 R37-R39 R64 R67 R70 R71 = jonnew; DK: PxxxxHTR-ND; MN: Panasonic; MPN: ERJ-3EKFxxxxV
R19 R20 R23 R26 R28 R29 R36 R66 R68 R69 = cyclops; DK: PxxxxHTR-ND; MN: Panasonic; MPN: ERJ-3EKFxxxxV

## Nets
2V5_REF: D5.1 J1.3 J2.3 R27.1
$N1: D2.3 F2.2 R10.1 R11.2 R13.2 R14.2 R15.2
$N2: D4.3 F4.2 R26.2 U3.8 U3.11
$N3: D1.3 F1.2 R1.1 R2.2 R4.2 R5.2 R6.2
$N101: D3.3 F3.2 R19.2 U3.3 U3.6
+1V8_ISO: C20.2 C34.2 C35.2 C50.2 C51.2 C55.2 C56.2 J4.2 L1.2 L2.1 L3.2 R72.1 R73.1 R74.1 TP22.1 U7.D1 U7.E1 U12.3 U12.17 U12.36
+3V3: C1.1 C3.1 C8.+ C9.2 C10.2 C12.2 C13.2 C14.2 C15.2 C18.2 C25.2 C26.2 C27.2 C28.2 C33.2 C42.2 C43.2 C44.2 C45.2 C46.2 C47.2 C49.2 C60.2 C63.2 C71.2 C72.2 C73.2 C74.2 C75.2 C81.2 FMC_LPC.P$116 FMC_LPC.P$118 FMC_LPC.P$120 FMC_LPC.P$159 J3.2 R20.2 R21.2 R22.2 R27.2 R28.2 R32.2 R33.2 TP10.1 TP11.1 U1.5 U2.5 U3.14 U4.1 U4.2 U5.1 U8.21 U8.22 U8.25 U8.29 U8.33 U8.36 U8.37 U9.P10 U9.P16 U10.P10 U10.P16 U11.2 U11.3 U11.5 U11.10 U11.16 U11.17 U11.23 U11.28 U11.30 U11.31 U13.P10 U13.P16 U14.P10 U14.P16 U16.1 U16.4 U16.8 U17.P1 U18.P10 U18.P16
+3V3_ISO: C17.2 C19.2 C32.2 C48.2 C59.2 C62.2 C64.2 C65.2 C66.2 C67.2 C68.2 C69.2 C70.2 C80.2 J4.3 R30.2 R31.2 R36.2 R56.1 R61.2 R62.2 R63.2 R65.2 R66.2 TP23.1 U5.8 U7.A1 U7.B1 U9.P1 U10.P1 U12.7 U12.20 U12.29 U13.P1 U14.P1 U17.P10 U17.P16 U18.P1 U18.P7
+3V3_ISO_PG: U11.27 U14.P11
+3V3_ISO_PG_ISO: R34.2 U7.D4 U14.P6
+3V3_ISO_PG_N [diff]: FMC_LPC.P$107 U11.33
+3V3_ISO_PG_P [diff]: FMC_LPC.P$106 U11.34
+5.5V_ISO: C22.2 C23.+ C24.+ C31.2 C77.1 C79.2 L4.1 TP24.1 U6.3 U7.A2 U7.B2 U7.B3 U7.D2 U7.D3 U7.E2
+12V_ATX: C11.+ C21.+ L7/0R.1 PCIE-PWR.1 PCIE-PWR.2 PCIE-PWR.3 TP13.1
+12V_FPGA: C5.+ C6.2 C7.2 FMC_LPC.P$155 FMC_LPC.P$157 J3.3 R24.2 R25.2 TP12.1
BIAS_DI0: J1.1 U4.3
BIAS_DI1: J2.1 U4.4
BISTEN: R65.1 U12.6 U15.1
D0: U9.P14 U11.6
D0_ISO: R55.1 U9.P3
D0_N [diff]: FMC_LPC.P$98 U11.63
D0_P [diff]: FMC_LPC.P$97 U11.64
D1: U9.P13 U11.7
D1_ISO: R54.1 U9.P4
D1_N [diff]: FMC_LPC.P$17 U11.61
D1_P [diff]: FMC_LPC.P$16 U11.62
D2: U9.P12 U11.8
D2_ISO: R53.1 U9.P5
D2_N [diff]: FMC_LPC.P$56 U11.59
D2_P [diff]: FMC_LPC.P$55 U11.60
D3: U9.P11 U11.9
D3_ISO: R52.1 U9.P6
D3_N [diff]: FMC_LPC.P$135 U11.57
D3_P [diff]: FMC_LPC.P$134 U11.58
D4: U10.P14 U11.11
D4_ISO: R51.1 U10.P3
D4_N [diff]: FMC_LPC.P$95 U11.55
D4_P [diff]: FMC_LPC.P$94 U11.56
D5: U10.P13 U11.12
D5_ISO: R50.1 U10.P4
D5_N [diff]: FMC_LPC.P$14 U11.53
D5_P [diff]: FMC_LPC.P$13 U11.54
D6: U10.P12 U11.13
D6_ISO: R49.1 U10.P5
D6_N [diff]: FMC_LPC.P$53 U11.51
D6_P [diff]: FMC_LPC.P$52 U11.52
D7: U10.P11 U11.14
D7_ISO: R48.1 U10.P6
D7_N [diff]: FMC_LPC.P$92 U11.49
D7_P [diff]: FMC_LPC.P$91 U11.50
D8: U11.19 U13.P14
D8_ISO: R47.1 U13.P3
D8_N [diff]: FMC_LPC.P$11 U11.47
D8_P [diff]: FMC_LPC.P$10 U11.48
D9: U11.20 U13.P13
D9_ISO: R46.1 U13.P4
D9_N [diff]: FMC_LPC.P$131 U11.45
D9_P [diff]: FMC_LPC.P$130 U11.46
D10: U11.21 U13.P12
D10_ISO: R45.1 U13.P5
D10_N [diff]: FMC_LPC.P$50 U11.43
D10_P [diff]: FMC_LPC.P$49 U11.44
D11: U11.22 U13.P11
D11_ISO: R44.1 U13.P6
D11_N [diff]: FMC_LPC.P$8 U11.41
D11_P [diff]: FMC_LPC.P$7 U11.42
DES_GPIO0: U8.23 U17.P6
DES_GPIO0_ISO: R60.1 U17.P11
DES_GPIO0_N [diff]: FMC_LPC.P$65 U8.19
DES_GPIO0_P [diff]: FMC_LPC.P$64 U8.18
DES_GPIO1: U8.24 U17.P5
DES_GPIO1_ISO: R59.1 U17.P12
DES_GPIO1_N [diff]: FMC_LPC.P$23 U8.17
DES_GPIO1_P [diff]: FMC_LPC.P$22 U8.16
DES_GPIO2: U8.26 U17.P4
DES_GPIO2_ISO: R58.1 U17.P13
DES_GPIO2_N [diff]: FMC_LPC.P$62 U8.14
DES_GPIO2_P [diff]: FMC_LPC.P$61 U8.13
DES_GPIO3: U8.27 U17.P3
DES_GPIO3_ISO: R57.1 U17.P14
DES_GPIO3_N [diff]: FMC_LPC.P$143 U8.12
DES_GPIO3_P [diff]: FMC_LPC.P$142 U8.11
DI0: TP2.TP U1.1 U16.2
DI0_N [diff]: FMC_LPC.P$68 U16.15
DI0_P [diff]: FMC_LPC.P$67 U16.16
DI0_TERM: R7.1 R8.1 U8.35
DI0_TERM_N [diff]: FMC_LPC.P$139 U8.2
DI0_TERM_P [diff]: FMC_LPC.P$138 U8.1
DI1: TP1.TP U2.1 U16.3
DI1_N [diff]: FMC_LPC.P$29 U16.13
DI1_P [diff]: FMC_LPC.P$28 U16.14
DI1_TERM: R16.1 R17.1 U8.34
DI1_TERM_N [diff]: FMC_LPC.P$59 U8.4
DI1_TERM_P [diff]: FMC_LPC.P$58 U8.3
DO0: U3.2 U3.5 U8.31
DO0_N [diff]: FMC_LPC.P$101 U8.9
DO0_P [diff]: FMC_LPC.P$100 U8.8
DO1: U3.9 U3.12 U8.32
DO1_N [diff]: FMC_LPC.P$20 U8.7
DO1_P [diff]: FMC_LPC.P$19 U8.6
DOUTP_F: C57.2 D7.C L5.2 LINK.CLK R70.2
GND: C1.2 C2.2 C3.2 C4.2 C5.- C6.1 C7.1 C8.- C9.1 C10.1 C11.- C12.1 C13.1 C14.1 C15.1 C16.1 C18.1 C21.- C25.1 C26.1 C27.1 C28.1 C33.1 C42.1 C43.1 C44.1 C45.1 C46.1 C47.1 C49.1 C60.1 C63.1 C71.1 C72.1 C73.1 C74.1 C75.1 C81.1 C82.1 D1.1 D2.1 D3.1 D4.1 D5.2 D6.A DI0.GND$1 DI0.GND$2 DI0.GND$3 DI0.GND$4 DI1.GND$1 DI1.GND$2 DI1.GND$3 DI1.GND$4 DO0.GND$1 DO0.GND$2 DO0.GND$3 DO0.GND$4 DO1.GND$1 DO1.GND$2 DO1.GND$3 DO1.GND$4 FMC_LPC.GNDA FMC_LPC.GNDB FMC_LPC.P$3 FMC_LPC.P$6 FMC_LPC.P$9 FMC_LPC.P$12 FMC_LPC.P$15 FMC_LPC.P$18 FMC_LPC.P$21 FMC_LPC.P$24 FMC_LPC.P$27 FMC_LPC.P$30 FMC_LPC.P$33 FMC_LPC.P$36 FMC_LPC.P$39 FMC_LPC.P$41 FMC_LPC.P$44 FMC_LPC.P$45 FMC_LPC.P$48 FMC_LPC.P$51 FMC_LPC.P$54 FMC_LPC.P$57 FMC_LPC.P$60 FMC_LPC.P$63 FMC_LPC.P$66 FMC_LPC.P$69 FMC_LPC.P$72 FMC_LPC.P$75 FMC_LPC.P$78 FMC_LPC.P$80 FMC_LPC.P$82 FMC_LPC.P$83 FMC_LPC.P$86 FMC_LPC.P$87 FMC_LPC.P$90 FMC_LPC.P$93 FMC_LPC.P$96 FMC_LPC.P$99 FMC_LPC.P$102 FMC_LPC.P$105 FMC_LPC.P$108 FMC_LPC.P$117 FMC_LPC.P$119 FMC_LPC.P$121 FMC_LPC.P$124 FMC_LPC.P$125 FMC_LPC.P$128 FMC_LPC.P$129 FMC_LPC.P$132 FMC_LPC.P$133 FMC_LPC.P$136 FMC_LPC.P$137 FMC_LPC.P$140 FMC_LPC.P$141 FMC_LPC.P$144 FMC_LPC.P$145 FMC_LPC.P$148 FMC_LPC.P$149 FMC_LPC.P$152 FMC_LPC.P$153 FMC_LPC.P$156 FMC_LPC.P$158 FMC_LPC.P$160 J3.1 J3.4 J6.G1 J6.G2 J6.G3 J6.G4 J8.G1 J8.G2 J8.G3 J8.G4 PCIE-PWR.4 PCIE-PWR.5 PCIE-PWR.6 Q1.S Q2.S Q3.S Q4.S R2.1 R9.1 R11.1 R18.1 R23.1 R29.1 R81.2 TERM.C1 TERM.C2 TP3.1 TP4.1 TP5.1 TP6.1 TP7.1 TP8.1 TP9.1 TP18.1 U1.2 U2.2 U3.7 U4.5 U4.6 U5.4 U6.2 U8.5 U8.10 U8.15 U8.20 U8.28 U8.30 U8.38 U9.P9 U9.P15 U10.P9 U10.P15 U11.1 U11.4 U11.15 U11.18 U11.29 U11.32 U13.P9 U13.P15 U14.P9 U14.P15 U16.5 U17.P2 U17.P8 U18.P9 U18.P15
GND_ISO: C17.1 C19.1 C20.1 C22.1 C23.- C24.- C29.1 C30.1 C31.1 C32.1 C34.1 C35.1 C36.1 C37.1 C38.1 C39.1 C40.1 C41.1 C48.1 C50.1 C51.1 C52.1 C53.1 C54.1 C55.1 C56.1 C59.1 C61.1 C62.1 C64.1 C65.1 C66.1 C67.1 C68.1 C69.1 C70.1 C76.2 C77.2 C78.1 C79.1 C80.1 C82.2 D7.A J4.1 J4.4 J5.G1 J5.G2 J5.G3 J5.G4 J7.G1 J7.G2 J7.G3 J7.G4 LINK.GND$1 LINK.GND$2 LINK.GND$3 LINK.GND$4 PWR/LOCK.C1 Q5.S Q6.S R35.2 R37.2 R38.2 R39.2 R42.2 R67.1 R69.1 R75.2 R76.2 R77.2 R83.1 S1.A TP17.1 TP21.1 TP25.1 TP26.1 U5.5 U6.5 U7.B5 U7.C1 U7.C2 U7.C5 U7.D5 U9.P2 U9.P8 U10.P2 U10.P8 U12.43 U12.44 U12.49 U13.P2 U13.P8 U14.P2 U14.P8 U15.5 U15.6 U15.7 U15.8 U17.P9 U17.P15 U18.P2 U18.P8
GPI0_N [diff]: FMC_LPC.P$26 U16.9
GPI0_P [diff]: FMC_LPC.P$25 U16.10
GPI1_N [diff]: FMC_LPC.P$104 U16.11
GPI1_P [diff]: FMC_LPC.P$103 U16.12
HSYNC: U11.24 U14.P14
HSYNC_ISO: R43.1 U14.P3
HSYNC_N [diff]: FMC_LPC.P$89 U11.39
HSYNC_P [diff]: FMC_LPC.P$88 U11.40
IDX0: R72.2 R75.1 U12.35
IDX1: R73.2 R76.1 U12.34
INTVCC: R34.1 U7.C3
LOCK: U16.6 U18.P14
LOCK_ISO: R68.2 U12.48 U18.P3
MODE: R74.2 R77.1 U12.37
N$1: Q5.G R64.1 R67.2
N$2: Q1.D R4.1 R5.1 R6.1
N$3: R1.2 U1.3
N$4: R40.2 U12.8
N$5: R39.1 U7.A4
N$6: DI1.CLK F2.1
N$7: Q2.D R13.1 R14.1 R15.1
N$8: C29.2 U7.A3
N$9: R17.2 TERM.A1
N$10: R37.1 U7.E4
N$11: DI0.CLK F1.1
N$12: C30.2 U7.E3
N$13: R41.2 U12.9
N$14: DO0.CLK F3.1
N$15: PWR/LOCK.A2 R66.1
N$16: R43.2 U12.10
N$17: DO1.CLK F4.1
N$18: C2.1 R3.2 U1.4
N$19: R10.2 U2.3
N$20: C4.1 R12.2 U2.4
N$21: L5.1 L6.2 R70.1 R71.2
N$22: C76.1 C78.2 L4.2 L6.1 R71.1
N$23: OUT.A1 R20.1
N$24: R21.1 U3.1 U3.4
N$25: R22.1 U3.10 U3.13
N$26: R35.1 U6.4
N$27: C57.1 U12.41
N$28: C58.1 U12.42
N$29: PWR/LOCK.C2 Q6.D
N$30: R8.2 TERM.A2
N$31: OUT.A2 R28.1
N$32: C58.2 R42.1
N$33: PWR/LOCK.A1 R36.1
N$34: Q2.G R16.2 R18.2
N$35: OUT.C1 Q3.D
N$36: J2.2 R12.1
N$37: Q1.G R7.2 R9.2
N$38: R57.2 U12.25
N$39: Q3.G R19.1 R23.2
N$40: J7.SIG R79.1
N$42: R81.1 R82.2
N$43: R82.1 R83.2
N$44: R46.2 U12.13
N$45: R47.2 U12.14
N$46: R48.2 U12.15
N$47: R49.2 U12.16
N$48: R50.2 U12.18
N$49: R51.2 U12.19
N$50: R52.2 U12.21
N$51: R53.2 U12.22
N$52: R54.2 U12.23
N$53: R55.2 U12.24
N$54: R44.2 U12.11
N$55: R45.2 U12.12
N$56: R78.1 U18.P5
N$57: R58.2 U12.26
N$58: R59.2 U12.27
N$59: R60.2 U12.28
N$60: OUT.C2 Q4.D
N$61: Q4.G R26.1 R29.2
N$62: Q6.G R68.1 R69.2
N$136: J1.2 R3.1
N$145: R38.1 U7.C4
OEN: R63.1 U12.5 U15.2
OSS_SEL: R62.1 U12.4 U15.3
PASS: U16.7 U18.P12
PASS_ISO: R78.2 U12.47
PCLK: U11.26 U14.P12
PCLK_ISO: R40.1 U14.P5
PCLK_N [diff]: FMC_LPC.P$43 U11.35
PCLK_P [diff]: FMC_LPC.P$42 U11.36
PDN_ISO: C61.2 Q5.D R56.2 R64.2 R80.2 S1.B U12.30
SCL: FMC_LPC.P$150 R33.1 TP20.1 U4.7 U5.3
SCL_ISO: R30.1 TP15.1 U5.6 U12.2
SDA: FMC_LPC.P$151 R32.1 TP19.1 U4.8 U5.2
SDA_ISO: R31.1 TP16.1 U5.7 U12.1
SEL: R61.1 U12.46 U15.4
SMA_IN: FMC_LPC.P$146 J6.SIG U18.P13
SMA_IN_ISO: J5.SIG U18.P4
SMA_OUT: FMC_LPC.P$147 J8.SIG U18.P11
SMA_OUT_ISO: R79.2 R80.1 U18.P6
TDI-TDO: FMC_LPC.P$110 FMC_LPC.P$111
V_PROTECT: C16.2 D1.2 D2.2 D3.2 D4.2 D6.C R24.1 R25.1 TP14.1
VDDCML0: C52.2 C53.2 C54.2 L3.1 U12.40
VDDCML1: C36.2 C37.2 C38.2 L1.1 U12.31
VDDPLL: C39.2 C40.2 C41.2 L2.2 U12.45
VIN: L7/0R.2 U6.1 U6.6
VSYNC: U11.25 U14.P13
VSYNC_ISO: R41.1 U14.P4
VSYNC_N [diff]: FMC_LPC.P$5 U11.37
VSYNC_P [diff]: FMC_LPC.P$4 U11.38

## Tracks (layer width: path | path; a pad name or v marks a point on that pad's centre or on a via)
2V5_REF
  Top 0.33: R27.1 30.74,89.88 D5.1 | 30.8,89.72 D5.1 | D5.1 30.85,88.44 32.18,87.12 36.38,87.12 J1.3
  Bottom 0.33: J1.3 40.13,85.2 41.43,83.9 41.43,75.59 40.04,74.2 J2.3
$N1
  Top 0.33: R13.2 23.6,69.84 | D2.3 14.61,74.21 R11.2 14.6,73.98 F2.2
  Top 0.381: R13.2 R15.2 R14.2 15.75,69.84 F2.2 | 23.6,69.84 24.75,71 24.75,72 25.75,73 R10.1
$N2
  Top 0.33: 14.6,48.98 R26.2
  Top 0.381: F4.2 14.6,48.98 | 21.19,50.62 19.4,50.62 D4.3 15.34,49.72 R26.2 | 21.19,50.62 24.29,50.62 25,49.91 U3.11 | U3.8 21.19,50.62
$N3
  Top 0.33: F1.2 R2.2 14.61,84.21 D1.3
  Top 0.381: F1.2 15.75,79.84 R4.2 R5.2 R6.2 24.75,81.09 24.75,82 25.75,83 R1.1
$N101
  Top 0.33: F3.2 14.61,55.98 | 26.25,53.7 U3.3
  Top 0.381: 14.61,55.98 R19.2 15.34,52.27 D3.3 19.15,51.62 22.46,51.62 | 22.46,51.62 25.54,51.62 26.25,52.33 26.25,53.7 | U3.6 22.46,51.62
+1V8_ISO  (via drill 0.3, 0.4)
  Top 0.152: R73.1 58.3,28.21 | R72.1 v59.11,26.34 | R74.1 v59.11,24.68
  Top 0.203: v56.1,30 55.1,31 53.94,31 53.77,31.16 | v57.5,29.9 58.37,29.02 R73.1 | 53.77,31.16 53.9,31.03 | 53.77,31.16 J4.2
  Top 0.254: U12.3 v74.3,26.74 | U12.17 v69.8,33.62 | U12.36 v64.05,25.74 | R73.1 v59.11,28.11
  Route15 0.229: 61.78,24.68 v59.11,24.68 v59.11,26.34 v59.11,28.11
  Bottom 0.203: v56.1,30 56.2,29.9 v57.5,29.9
  other vias: 95.93,19.89 94.55,20.02 93.68,18.89 95.18,18.89 94.05,21.89 93.05,20.02 92.43,19.02 69.8,19.49 69.93,18.74 69.55,20.12 69.18,19.49 67.93,18.74 70.93,18.74 68.8,18.74 74.68,26.37 74.55,25.74 73.8,25.87 70.8,33.74 71.23,34.27 70.3,34.14 63.3,25.12 64.05,25.12 63.3,25.74 91.68,19.74 63.68,24.62
  pour Bottom (no thermals): 65.05,26.49 65.05,24.72 64.32,24.37 61.68,24.37 61.68,25.96 62.21,26.49
  pour Bottom (no thermals): 73.3,28.12 73.3,26.35 73.66,25.49 75.18,25.49 75.18,28.12
  pour Bottom (no thermals): 69.55,32.62 71.32,32.62 71.55,33.35 71.55,34.49 69.55,34.49
  pour Bottom (no thermals): 71.3,20.37 67.68,20.37 67.68,18.37 67.8,18.24 71.3,18.24
  pour Top (rank 2, no thermals): 96.3,22.52 91.3,22.52 91.3,16.79 96.3,16.79
  pour Route15 (isolate 0.254, no thermals): 75.3,22.49 96.55,22.49 96.55,14.62 62.8,14.62 62.8,22.87 61.55,24.12 61.55,26.04 62.26,26.74 65.43,26.74 65.43,29.23 69.3,33.11 69.3,34.74 71.93,34.74 71.93,32.87 72.55,32.24 72.65,29.1 73.53,28.24 75.3,28.24
+3V3  (via drill 0.3, 0.4, 0.5)
  Top 0.127: U11.28 87.62,63.68 v87.3,63.99 | U11.5 76.12,63.68 v76.43,63.99 | U11.10 78.62,63.99 v78.68,63.99 | U11.23 85.12,63.99 v85.18,63.99 | 75.08,62.65 U11.3 | U11.30 arc90 88.65,62.62
  Top 0.152: U10.P16 71.42,53.82 71.92,53.32 78.54,53.32 79.04,53.82 U10.P10 | U13.P16 83.92,53.82 84.42,53.32 91.04,53.32 91.54,53.82 U13.P10 | U14.P16 96.17,53.82 96.67,53.32 103.29,53.32 103.79,53.82 U14.P10 | U9.P16 59.17,53.82 59.67,53.32 66.29,53.32 66.79,53.82 U9.P10 | R22.2 v24.5,42.92 | 28.78,45.87 28.84,43.8 C12.2 | U8.33 64.75,63.6 64.75,63.74 64.9,63.9 66.75,63.9 | U8.36 U8.37 | U8.22 U8.21 | U11.2 U11.3 | U11.30 U11.31 | v22.1,56.9 23.24,56.9 R21.2 | U18.P10 42.29,53.69 42,53.4 34.9,53.4 34.67,53.62 U18.P16
  Top 0.229: R33.2 v109.83,55.31 v109.83,55.32 | R32.2 v112.14,55.36 v112.13,55.37
  Top 0.254: R28.2 v19.75,63.5 | U11.16 81.93,62.65 U11.17 | R20.2 v19.75,61.5 | U8.37 66.75,63.9 | U8.21 58.75,64.06 59.3,64.62 v59.68,64.62 60.08,64.62 60.75,63.95 U8.25 | U8.29 62.75,64.37 v62.8,64.37 | v89.18,63.99 89.12,63.93 U11.31 | v74.55,63.99 74.62,63.93 U11.2 | v51.68,64.49 51.01,63.83 50.99,63.83 50.59,63.43 U16.1 | U16.4 52.54,64.36 v52.68,64.49 | U16.8 55.14,64.03 54.68,64.49 v54.05,64.49
  Top 0.33: 32.45,79.5 C1.1 | R27.2 v28.93,92.62
  Top 0.406: U4.1 39.21,91.09 39.69,91.57 C14.2 v39.69,93.49 v39.68,93.49 | v38.68,92.37 39.68,92.37 | v35.05,92.87 C15.2 36.4,90.44 U4.2 | 29.18,50.12 28.81,49.75 U3.14 28.86,48.47 C13.2 C12.2 | v29.78,45.87 28.78,45.87 | U1.5 32.5,79.58 C1.1 32.41,78.38 v32.43,78.37 | U2.5 32.5,69.53 C3.1 32.54,68.38 v32.55,68.37 | U13.P16 83.92,56.39 v83.87,56.45 | U10.P16 71.42,56.39 v71.37,56.45 | U9.P16 59.17,56.27 v58.99,56.45 | U14.P16 96.17,56.39 v96.12,56.45 | 81.93,62.65 v81.93,63.99 | FMC_LPC.P$120 v104.28,104.19 FMC_LPC.P$159 v105.55,105.46 | v105.55,104.19 FMC_LPC.P$118 106.81,102.92 v106.81,102.66 107.83,102.66 FMC_LPC.P$116 | U18.P16 34.67,56.31 v34.59,56.31 | U17.P1 v55.8,56.31 v55.79,56.31 | 66.75,63.9 66.75,63.94 v67.55,64.74 | v113.83,51.17 112.93,51.17 U5.1 | v28.18,42.6 28.84,43.26 28.84,43.8
  Bottom 0.254: 50.55,64.87 50.55,64.88 | v67.55,64.74 67.55,64.49
  Bottom 0.406: C60.2 83.69,56.63 v83.87,56.45 | C49.2 71.19,56.63 v71.37,56.45 | C33.2 58.94,56.5 v58.99,56.45 | C63.2 95.94,56.63 v96.12,56.45 | C9.2 v104.28,104.19 104.81,104.72 C8.+ | C10.2 v105.55,104.19 | v55.79,56.31 56.03,56.55 C71.2 | C81.2 34.47,56.31 v34.59,56.31 | C18.2 v113.83,51.17
  pour Bottom (no thermals): 72.68,64.37 72.68,63.12 91.18,63.12 91.18,64.37
  pour Route15 (rank 2, no thermals): -8.7,42.12 28.3,42.12 30.3,44.12 30.3,51.62 32.3,53.62 104.55,53.62 108.8,49.37 113.87,49.37 116,51.5 124.7,51.5 127.3,48.9 127.3,29.12 132.8,29.12 132.8,14.62 177.34,14.62 177.34,113.72 -8.7,113.72
  pour Bottom (no thermals): 50.43,67.12 50.43,64.24 55.3,64.24 55.3,67.12
  pour Bottom (no thermals): 57.43,65.49 57.43,63.87 69.43,63.87 69.43,65.49
+3V3_ISO  (via drill 0.3, 0.4, 0.5)
  Top 0.152: R65.2 78.29,31.6 arc90 78.31,31.57 | U17.P10 48.18,45.62 48.65,46.1 55.28,46.1 55.87,45.52 55.87,44.62 U17.P16 | U18.P1 34.67,45.47 35.2,46 41.8,46 42.3,45.5 U18.P7 | v83.48,31.63 82.54,31.63 arc90 R61.2 R62.2 R63.2 78.31,31.57 | v77.38,31.33 77.61,31.57 78.31,31.57 | R31.2 112.33,42.73 112.4,42.73 112.4,42.72 v113.33,42.72 | v108.62,42.72 109.63,42.72 R30.2
  Top 0.254: U12.20 v68.3,33.74 | U12.29 63.93,29.24 v63.55,29.62 | U12.7 73.93,28.74 v74.43,28.79 | R66.2 v19.18,37.87 | R56.1 60.93,30.25 61.18,30.49 v61.18,31.12 | R36.2 13.13,34.42 v13.18,34.37
  Top 0.406: U9.P1 59.17,43.49 v58.8,43.12 | U10.P1 71.42,43.36 v71.18,43.12 | U13.P1 83.92,43.36 v83.68,43.12 | U14.P1 96.17,43.49 v95.8,43.12 | U18.P1 v34.68,42.9 | U17.P16 55.8,43.28 v55.98,43.1 | v113.83,44.36 112.93,44.36 U5.8
  Bottom 0.406: v58.8,43.12 58.8,42.13 C32.2 | v71.18,43.12 71.18,42.13 C48.2 | v83.68,43.12 83.68,42.13 C59.2 | v95.8,43.12 95.8,42.13 C62.2 | C70.2 56.03,43.05 v55.98,43.1 | C80.2 34.68,42.17 v34.68,42.9 | C17.2 v113.83,44.36
  other vias: 75.05,29.12 75.78,30.02 61.8,30.74 62.55,30.12 61.55,29.87 63.17,33.5 59.8,32.87 64.53,33.43 61.78,34.09 59.93,31.37 75.68,29.12 92.05,28.37 94.43,29.24 92.55,29.87 94.55,30.74 92.05,30.87 93.3,28.24 95.43,28.37 95.55,30.12 65.91,33.88
  pour Bottom (no thermals): 65.05,29.49 65.05,32.24 65.3,32.49 68.68,32.49 68.68,34.37 59.55,34.37 59.55,29.49
  pour Bottom (no thermals): 73.3,28.87 73.3,30.64 74.03,30.87 75.93,30.87 75.93,28.87
  pour Route15 (rank 2, no thermals): 128.3,14.62 128.3,25.12 121.3,25.12 121.3,45.62 34.32,45.62 34.32,40.62 32.32,38.62 -9.7,38.62 -9.7,14.62
  pour Top (no thermals): 91.3,24.89 96.18,24.89 96.18,31.39 91.3,31.39
+3V3_ISO_PG
  Top 0.152: 87.12,61.93 U11.27 87.12,61.95 arc90 87.47,61.59 89.85,61.59 89.88,61.62 100.03,61.62 arc-90 102.53,59.12 102.53,56.99 U14.P11
+3V3_ISO_PG_ISO  (via drill 0.3)
  Top 0.152: R34.2 103.18,21.41 103.18,14.49 122.2,14.49 123.55,15.85 v123.55,24.62 | U14.P6 102.55,44.62 v102.55,43.12
  Top 0.254: U7.D4 100.18,21.89 102.67,21.89 R34.2
  Bottom 0.152: v123.55,24.62 123.18,24.99 121.8,24.99 121.55,25.24 121.55,40.4 121.55,44.04 119.98,45.62 112.5,45.62 103.55,45.62 102.55,44.62 v102.55,43.12
+3V3_ISO_PG_N  (via drill 0.33)
  Top 0.229: v90.1,69.12 89.62,69.6 U11.33 | v92.8,69.09 93.49,69.79 93.62,69.92 94,69.92 148.86,69.94 155.51,76.59 155.51,99.46 154.31,100.66 154.31,102.79 155.2,103.68 155.48,103.93 155.48,105.19 153.88,106.8 123.2,106.8 122,105.6 122,104.5 121.7,104.2 120.79,104.2 FMC_LPC.P$107
  Bottom 0.229: v92.8,69.09 90.3,69.09 v90.1,69.12
+3V3_ISO_PG_P  (via drill 0.33)
  Top 0.229: U11.34 89.1,70.78 89.1,69.32 v89.2,69.22 | v92.18,69.7 92.78,69.7 93.4,70.32 148.63,70.3 155.15,76.82 155.15,79.38 arc90 154.88,79.65 154.85,79.65 arc-90 154.57,79.92 154.57,80.6 arc-90 154.85,80.87 154.88,80.87 arc90 155.15,81.14 155.15,81.82 arc90 154.88,82.09 154.85,82.09 arc-90 154.57,82.36 154.57,83.04 arc-90 154.85,83.31 154.88,83.31 arc90 155.15,83.58 155.15,84.26 arc90 154.88,84.53 154.85,84.53 arc-90 154.57,84.8 154.57,85.48 arc-90 154.85,85.75 154.88,85.75 arc90 155.15,86.03 155.15,99.31 153.93,100.53 153.93,103.04 155.12,104.23 155.12,105.05 153.73,106.44 123.8,106.44 123.33,105.97 123.33,104.62 122.9,104.2 122.4,104.2 122.1,103.9 122.1,103.7 121.9,103.5 121.48,103.5 arc-90 FMC_LPC.P$106
  Bottom 0.229: v92.18,69.7 89.68,69.7 v89.2,69.22
+5.5V_ISO  (via drill 0.3, 0.6)
  Bottom 0.406: v97.68,21.89 v97.68,25.64
  other vias: 109.68,25.62 107.43,25.62 108.68,22.99 112.18,23.49 107.18,23.12 109.18,24.12 113.8,24.24 97.55,19.37 98.68,16.87 99.55,19.12 99.3,15.62 100.43,15.12 97.43,16.37 98.18,18.12 112.3,24.99 110.8,26.12 114.93,25.24 115.18,23.62 110.8,24.62 108.3,24.99 113.43,25.37 110.43,23.62 99.43,17.74 97.93,15.24 97.18,17.74 101.3,15.99 107.8,24.12
  pour Top (no thermals): 105.93,19.37 105.93,39.99 121.25,40 121.25,30.5 113.5,30.5 113.5,26.75 115.75,26.75 115.8,19.37
  pour Top (rank 2, no thermals): 102.8,14.62 96.8,14.62 96.8,22.77 99.18,22.77 99.05,20.89 102.8,20.89
  pour Top (rank 2, no thermals): 96.8,24.77 98.55,24.77 98.55,25.27 97.05,26.77 96.8,26.77
  pour Top (no thermals): 12.68,18.12 96.8,18.12 96.8,14.62 12.68,14.62
  pour Route15 (no thermals): 97.18,14.62 97.18,19.37 105.93,19.37 105.93,27.87 116.05,27.87 116.05,14.62
+12V_ATX
  pour Top (isolate 0.61, no thermals): 128.93,48.37 144.8,48.37 146.3,49.87 146.3,54.51 147.53,55.74 150.32,55.74 151.8,54.13 151.8,44.24 150.43,42.87 150.43,27.99 155.05,27.99 155.05,60.49 128.93,60.49
+12V_FPGA  (via drill 0.4, 0.6)
  Top 0.254: TP12.1 68.18,109.39
  Top 0.406: R25.2 R24.2 | FMC_LPC.P$157 v108.08,104.19 | FMC_LPC.P$155 v109.48,104.19
  Top 0.61: v106.81,109.39 68.18,109.39 52.1,109.39 | 52.1,109.39 35.9,109.39 24.68,98.17 R24.2 | J3.3 52.1,109.39
  Bottom 0.406: v108.08,104.19 C7.2 | C6.2 v109.48,104.19 v108.08,104.19 | C5.+ 108.59,104.69 v108.08,104.19
  Bottom 0.61: C5.+ 108.7,108.52 107.83,109.39 v106.81,109.39
BIAS_DI0
  Top 0.33: U4.3 36.81,89.79 36.43,89.4 36.43,88.58 37.13,87.87 40.04,87.87 40.93,86.98 40.93,81.24 39.81,80.12 J1.1
BIAS_DI1
  Top 0.33: U4.4 39.96,89.14 41.93,87.17 41.93,71.24 39.8,69.12 J2.1
BISTEN
  Top 0.152: 77.12,27.99 76.75,27.99 U15.1 | U12.6 76.5,28.24 U15.1 | R65.1 78.29,29.13 77.22,28.07 U15.1
D0
  Top 0.152: 61.68,57.49 61.68,57.37 | 76.62,61.93 76.62,62.52 | 76.62,62.52 U11.6 | U9.P14 61.68,54.78 61.68,57.49 | 76.62,62.52 76.62,61.81 arc-90 76.4,61.59 73.88,61.59 73.86,61.62 66.54,61.62 arc90 65.9,60.98 arc-90 65.22,60.3 64.48,60.3 arc90 61.68,57.49
D0_ISO
  Top 0.152: U9.P3 61.8,44.53 61.8,43.33 arc-45 61.66,42.97 61.2,42.52 arc-45 60.84,42.37 58.05,42.37 arc90 56.9,41.22 56.9,40.69 arc90 57.98,39.62 64.04,39.62 arc-45 64.39,39.47 65.03,38.84 arc-45 65.21,38.39 R55.1
D0_N  (via drill 0.33)
  Top 0.229: FMC_LPC.P$98 v132.22,102.92 | v132.6,97.33 132.6,96.44 132.34,96.19 132.34,94.28 132.27,94.08 132.27,87.67 129.54,84.94 82.38,84.94 81.74,84.31 arc-90 80.85,84.31 arc90 80.47,84.31 80.03,83.87 arc90 80.03,83.49 arc-90 80.03,82.6 77.97,80.54 arc-90 77.08,80.54 arc90 76.7,80.54 76.64,80.48 arc90 76.64,80.09 arc-90 76.64,79.2 76.51,79.08 arc-90 75.62,79.08 arc90 75.24,79.08 75.17,79.02 arc90 75.17,78.63 arc-90 75.17,77.74 74.62,77.18 U11.63
  Bottom 0.229: v132.22,102.92 132.85,102.28 132.85,97.58 v132.6,97.33
D0_P  (via drill 0.33)
  Top 0.229: 74.12,77.19 74.92,77.99 arc90 74.92,78.38 arc-90 74.92,79.27 74.98,79.33 arc-90 75.87,79.33 arc90 76.26,79.33 76.38,79.45 arc90 76.38,79.84 arc-90 76.38,80.73 76.45,80.79 arc-90 77.34,80.79 arc90 77.72,80.79 78.42,81.48 arc90 78.42,81.87 arc-90 78.42,82.26 78.94,82.78 arc-90 79.32,82.78 arc90 79.71,82.78 79.78,82.85 arc90 79.78,83.23 arc-90 79.78,84.12 80.21,84.56 arc-90 81.1,84.56 81.39,84.56 arc45 81.56,84.63 82.23,85.3 129.37,85.3 131.91,87.84 131.91,94.48 131.96,94.66 v131.96,96.69 | FMC_LPC.P$97 132.85,102.28 v132.22,101.65 | U11.64 74.12,77.19 | 74.12,77.19 | 74.12,77.19 74.38,77.44
  Bottom 0.229: v132.22,101.65 132.22,97.96 131.96,97.71 v131.96,96.69
D1
  Top 0.152: 63.05,57.7 63.05,57.6 | 77.12,61.93 U11.7 77.12,61.74 arc-90 76.62,61.24 67.3,61.24 arc90 66.6,60.54 arc-90 65.75,59.7 65.05,59.7 arc90 63.05,57.7 | U9.P13 63.05,54.78 63.05,57.7
D1_ISO
  Top 0.152: U9.P4 62.98,43.26 arc-45 62.84,42.9 61.95,42.02 arc-45 61.59,41.87 58.65,41.87 arc90 58.15,41.37 58.15,40.74 arc90 58.65,40.24 64.66,40.24 arc-45 65.02,40.1 66.35,38.77 arc-45 66.53,38.32 R54.1
D1_N  (via drill 0.33)
  Top 0.229: FMC_LPC.P$17 v133.49,99.11 | v133.61,96.69 133.61,95.93 133.16,95.48 133.16,90.95 arc90 133.43,90.68 arc-90 134.06,90.05 134.06,89.98 arc-90 133.43,89.35 arc90 133.16,89.07 133.16,89 arc90 133.43,88.73 arc-90 134.06,88.1 134.06,88.07 arc-90 133.43,87.44 arc90 133.16,87.17 133.16,87.09 arc90 133.43,86.82 arc-90 134.06,86.19 134.06,86.17 arc-90 133.43,85.54 arc-13 132.47,85.64 arc26 132.22,85.64 arc117 132.22,85.14 arc-66 132.34,84.37 arc-97 131.33,83.99 130.64,83.94 82.88,83.94 75.62,76.68 U11.61
  Bottom 0.229: v133.49,99.11 133.61,98.98 v133.61,96.69
D1_P
  Top 0.229: 75.12,76.69 82.73,84.3 114.36,84.3 115.3,84.3 arc90 115.43,84.43 arc-90 115.55,84.55 116.37,84.55 arc-90 116.49,84.43 arc90 116.62,84.3 117.43,84.3 arc90 117.56,84.43 arc-90 117.69,84.55 118.5,84.55 arc-90 118.63,84.43 arc90 118.75,84.3 119.57,84.3 arc90 119.69,84.43 arc-90 119.82,84.55 120.63,84.55 arc-90 120.76,84.43 arc90 120.89,84.3 121.7,84.3 arc90 121.83,84.43 arc-90 121.95,84.55 122.77,84.55 arc-90 122.89,84.43 arc90 123.02,84.3 123.83,84.3 arc90 123.96,84.43 arc-90 124.09,84.55 124.9,84.55 arc-90 125.03,84.43 arc90 125.15,84.3 125.97,84.3 arc90 126.09,84.43 arc-90 126.22,84.55 127.03,84.55 arc-90 127.16,84.43 arc90 127.29,84.3 128.1,84.3 arc90 128.23,84.43 128.23,84.45 arc-90 128.33,84.55 129.17,84.55 arc-90 129.29,84.43 arc90 129.42,84.3 130.46,84.3 130.62,84.46 arc-32 130.77,84.5 131.33,84.5 arc185 131.83,84.88 arc-154 132.47,86.03 arc16 133.43,85.89 arc90 133.7,86.17 133.7,86.19 arc90 133.43,86.47 arc-90 132.8,87.09 132.8,87.17 arc-90 133.43,87.8 arc90 133.7,88.07 133.7,88.1 arc90 133.43,88.37 arc-90 132.8,89 132.8,89.07 arc-90 133.43,89.7 arc90 133.7,89.98 133.7,90.05 arc90 133.43,90.33 arc-90 132.8,90.95 132.8,96.01 133.1,96.31 133.1,97.46 FMC_LPC.P$16 | U11.62 75.12,76.69 | 75.12,76.69 | 75.12,76.69 75.58,77.14
D2
  Top 0.152: 64.43,57.99 64.43,57.71 | U11.8 77.62,61.37 arc-90 77.12,60.87 68.33,60.87 arc90 67.4,59.94 arc-90 66.55,59.1 65.53,59.1 arc90 64.43,57.99 | U9.P12 64.43,54.78 64.43,57.99
D2_ISO
  Top 0.152: U9.P5 64.3,44.57 64.3,42.58 arc-45 64.16,42.22 63.57,41.64 arc-45 63.22,41.49 59.57,41.49 arc90 59.25,41.18 59.25,40.94 arc90 59.57,40.62 65.04,40.62 arc-45 65.39,40.47 67.67,38.19 arc-45 67.86,37.75 R53.1
D2_N
  Top 0.229: FMC_LPC.P$56 134.75,98.48 134.75,96.69 134.93,96.13 134.93,95.99 arc-90 134.3,95.36 arc90 134.03,95.09 134.03,95.06 arc90 134.3,94.78 arc-90 134.93,94.15 134.93,94.17 arc-90 134.3,93.54 arc90 134.03,93.27 134.03,93.28 arc90 134.3,93 | 134.3,93 arc-90 134.93,92.38 | 134.3,93 arc-90 134.93,92.38 | 134.93,92.38 134.93,92.39 arc-90 134.3,91.76 arc90 134.03,91.49 134.03,91.5 arc90 134.3,91.23 arc-90 134.93,90.6 134.93,85.48 134.43,84.97 arc90 134.43,84.55 134.87,84.11 arc-90 134.87,83.69 134.09,82.92 arc-90 133.67,82.92 133.23,83.36 arc90 132.81,83.36 132.39,82.94 83.38,82.94 76.62,76.18 U11.59
D2_P  (via drill 0.33)
  Top 0.229: FMC_LPC.P$55 135.39,100.09 134.85,100.63 v134.37,100.63 | v134.12,97.58 134.25,97.46 134.25,96.57 134.58,95.99 134.58,95.99 arc-90 134.3,95.72 arc90 133.68,95.09 133.68,95.06 arc90 134.3,94.43 arc-90 134.58,94.15 134.58,94.17 arc-90 134.3,93.9 arc90 133.68,93.27 133.68,93.28 arc90 134.3,92.65 | 134.3,92.65 arc-90 134.58,92.38 | 134.3,92.65 arc-90 134.58,92.38 | 134.58,92.38 134.58,92.39 arc-90 134.3,92.12 arc90 133.68,91.49 133.68,91.5 arc90 134.3,90.87 arc-90 134.58,90.6 134.58,85.66 132.22,83.3 83.23,83.3 76.12,76.19 U11.60
  Bottom 0.229: v134.37,100.63 134.12,100.38 v134.12,97.58
D3
  Top 0.152: 70,60.49 69.8,60.49 | 70,60.49 77.62,60.49 arc90 78.12,60.99 U11.9 | 65.55,54.78 U9.P11 65.52,56.51 arc-90 66.51,57.5 67.18,57.5 arc90 68.2,58.52 68.2,59.47 arc-90 69.22,60.49 70,60.49
D3_ISO
  Top 0.152: U9.P6 65.52,42.32 arc90 66.34,41.49 67.26,41.49 arc90 68.8,43.03 68.8,44.31 arc-90 69.53,45.04 69.82,45.04 arc-90 70.55,44.31 arc-44 69.78,42.42 arc23 69.64,42.22 arc23 69.18,39.9 R52.1
D3_N  (via drill 0.33)
  Top 0.229: FMC_LPC.P$135 v136.03,104.19 | v135.77,96.82 135.77,96.44 135.69,96.36 135.69,90.61 arc90 135.97,90.34 arc-90 136.24,90.06 136.24,90.03 arc-90 135.97,89.76 arc90 135.69,89.48 135.69,87.93 arc90 135.97,87.65 arc-90 136.24,87.38 136.24,87.35 arc-90 135.97,87.08 arc90 135.69,86.8 135.69,86.77 arc90 135.97,86.5 arc-90 136.24,86.22 136.24,86.19 arc-90 135.97,85.92 arc90 135.69,85.64 135.69,83.23 134.41,81.94 83.88,81.94 77.62,75.68 U11.57
  Bottom 0.229: v136.03,104.19 135.26,103.42 135.26,102.15 136.15,101.27 136.15,97.2 v135.77,96.82
D3_P  (via drill 0.33)
  Top 0.229: FMC_LPC.P$134 136.03,105.46 135.12,105.46 134.75,105.1 134.75,101.77 v135.01,101.52 | v135.26,97.33 135.26,96.44 135.34,96.36 135.34,83.45 134.19,82.3 83.73,82.3 77.12,75.69 U11.58
  Bottom 0.229: v135.01,101.52 135.77,100.76 135.77,97.83 v135.26,97.33
D4
  Top 0.152: U11.11 79.05,62.65 79.05,61.09 arc-90 78.08,60.12 70.2,60.12 arc90 69.3,59.22 69.3,58 arc90 70.19,57.12 73.37,57.12 arc-90 73.96,56.53 U10.P14
D4_ISO
  Top 0.152: U10.P3 73.96,43.24 arc-90 73.21,42.49 70.95,42.49 arc90 70.45,41.99 70.45,41.49 arc90 70.95,40.99 75.82,40.99 arc-90 76.27,40.54 arc-90 75.83,40.1 73.26,40.1 arc45 72.81,39.91 70.69,37.78 arc45 70.5,37.33 R51.1
D4_N  (via drill 0.33)
  Top 0.229: FMC_LPC.P$95 v136.03,102.92 | v136.91,97.2 136.91,96.31 136.97,96.36 136.97,83.3 134.6,80.94 84.38,80.94 78.62,75.18 U11.55
  Bottom 0.229: v136.03,102.92 136.79,102.15 136.79,97.33 v136.91,97.2
D4_P
  Top 0.229: FMC_LPC.P$94 136.66,102.79 136.03,102.15 136.03,97.96 136.41,97.58 136.41,96.32 136.61,96.11 136.61,95.56 arc-90 136.34,95.29 arc90 136.06,95.02 136.06,94.19 arc90 136.34,93.92 arc-90 136.61,93.65 136.61,83.52 134.39,81.3 84.23,81.3 78.12,75.19 U11.56
D5
  Top 0.152: U11.12 79.62,60.76 arc-90 78.6,59.74 71.3,59.74 arc90 70.68,59.12 70.68,58.66 arc90 71.26,58.07 74.36,58.07 arc-90 75.25,57.17 75.25,54.78 U10.P13
D5_ISO